# Altium PCB нижняя плата версия 4_13.03.PcbDoc
Units mm, origin at the board's own origin, x right, y up, seen from the top; angles counter-clockwise.
Board outline 57.07 x 52.6 mm, 4 copper layers (Top Layer, Layer 1, Layer 2, Bottom Layer), stack 0.603 mm thick; 110 components, 105 nets, 540 pads, 92 vias.
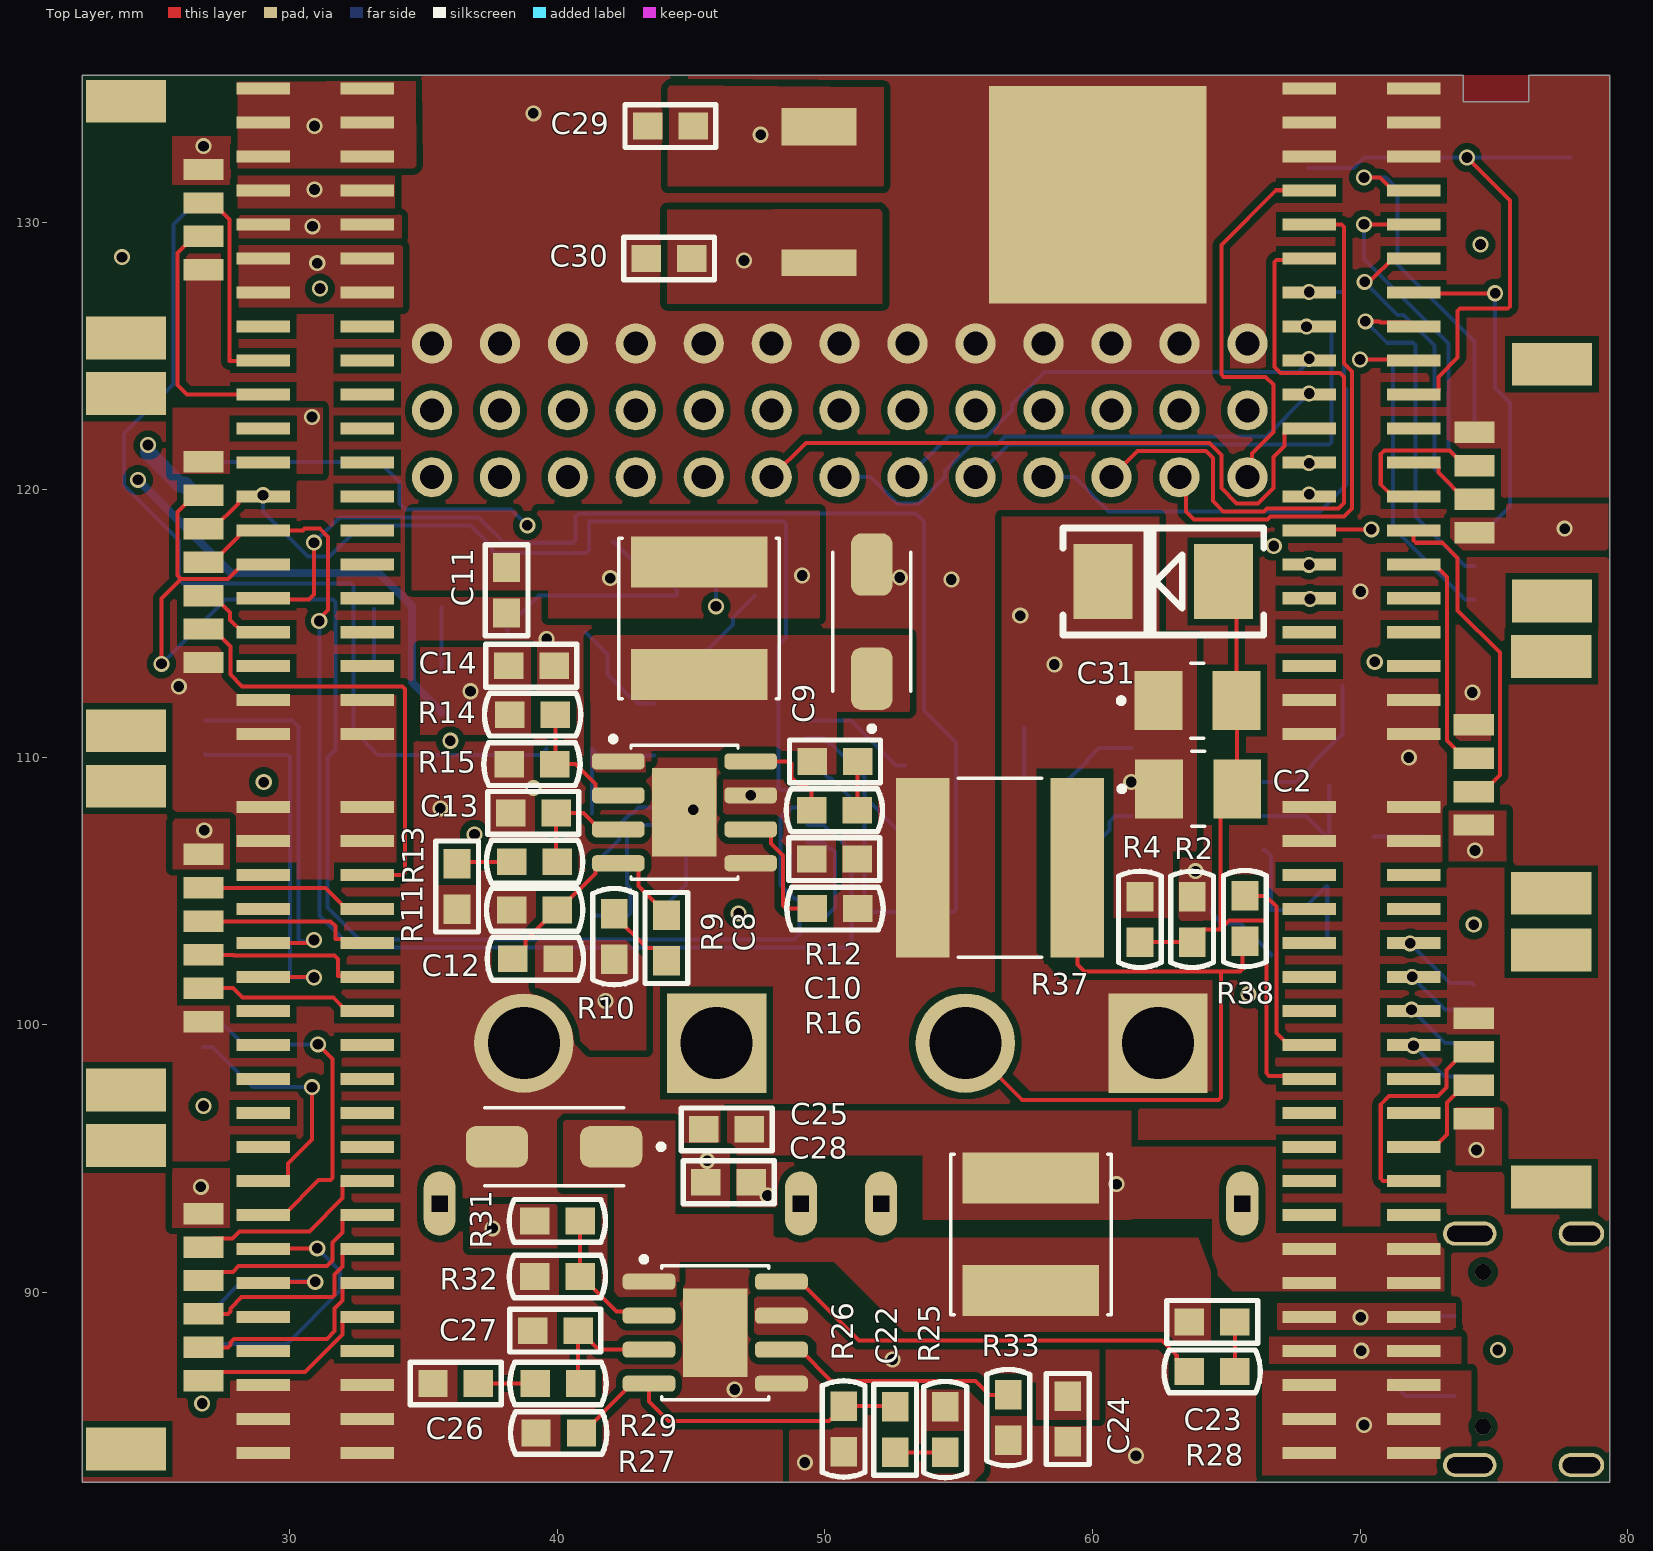
[diagram p0: Top Layer view]
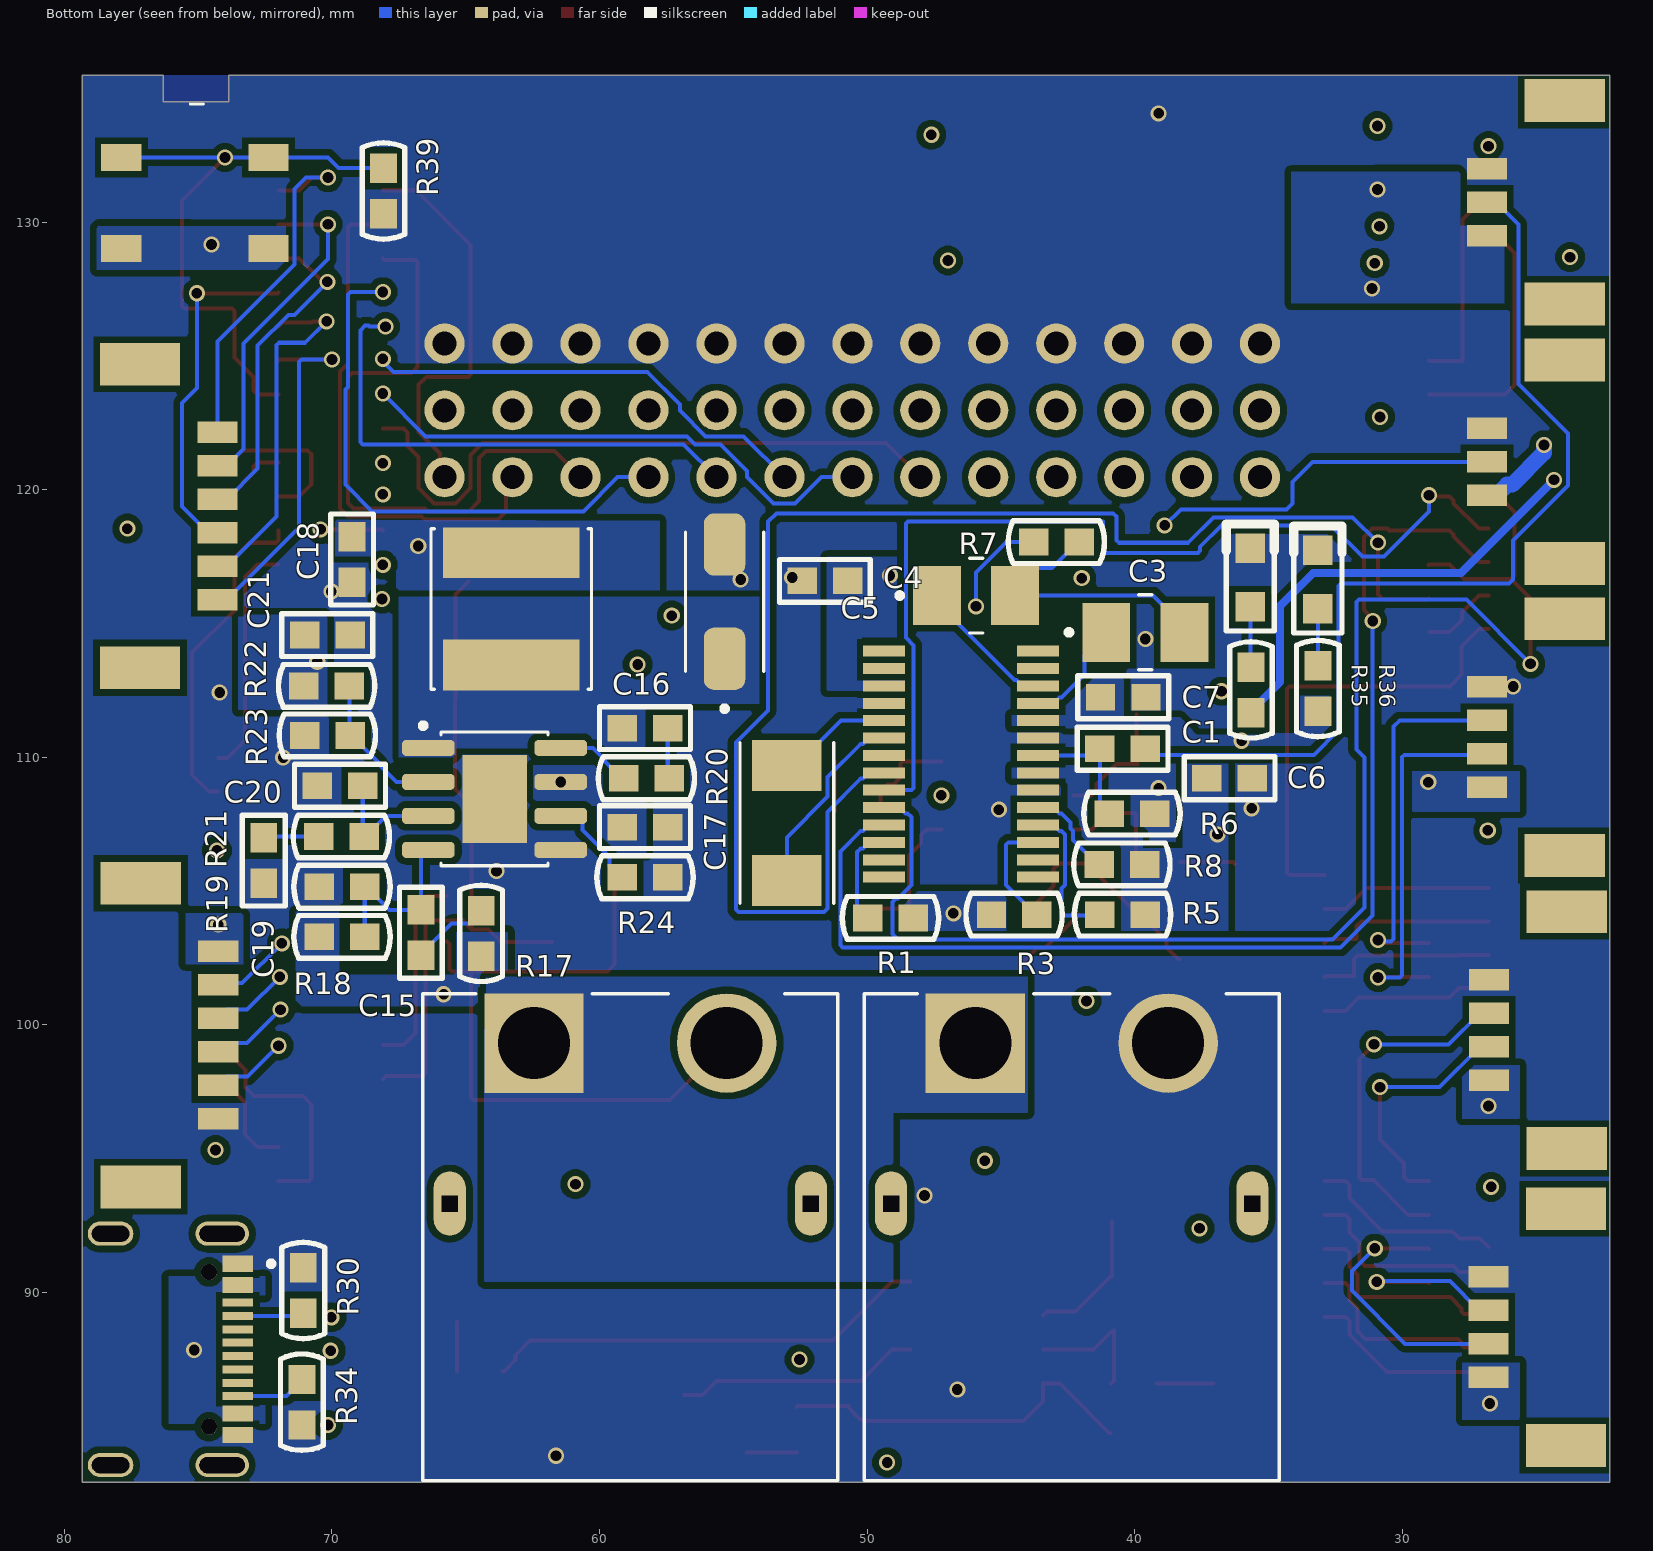
[diagram p1: Bottom Layer view, seen from below]
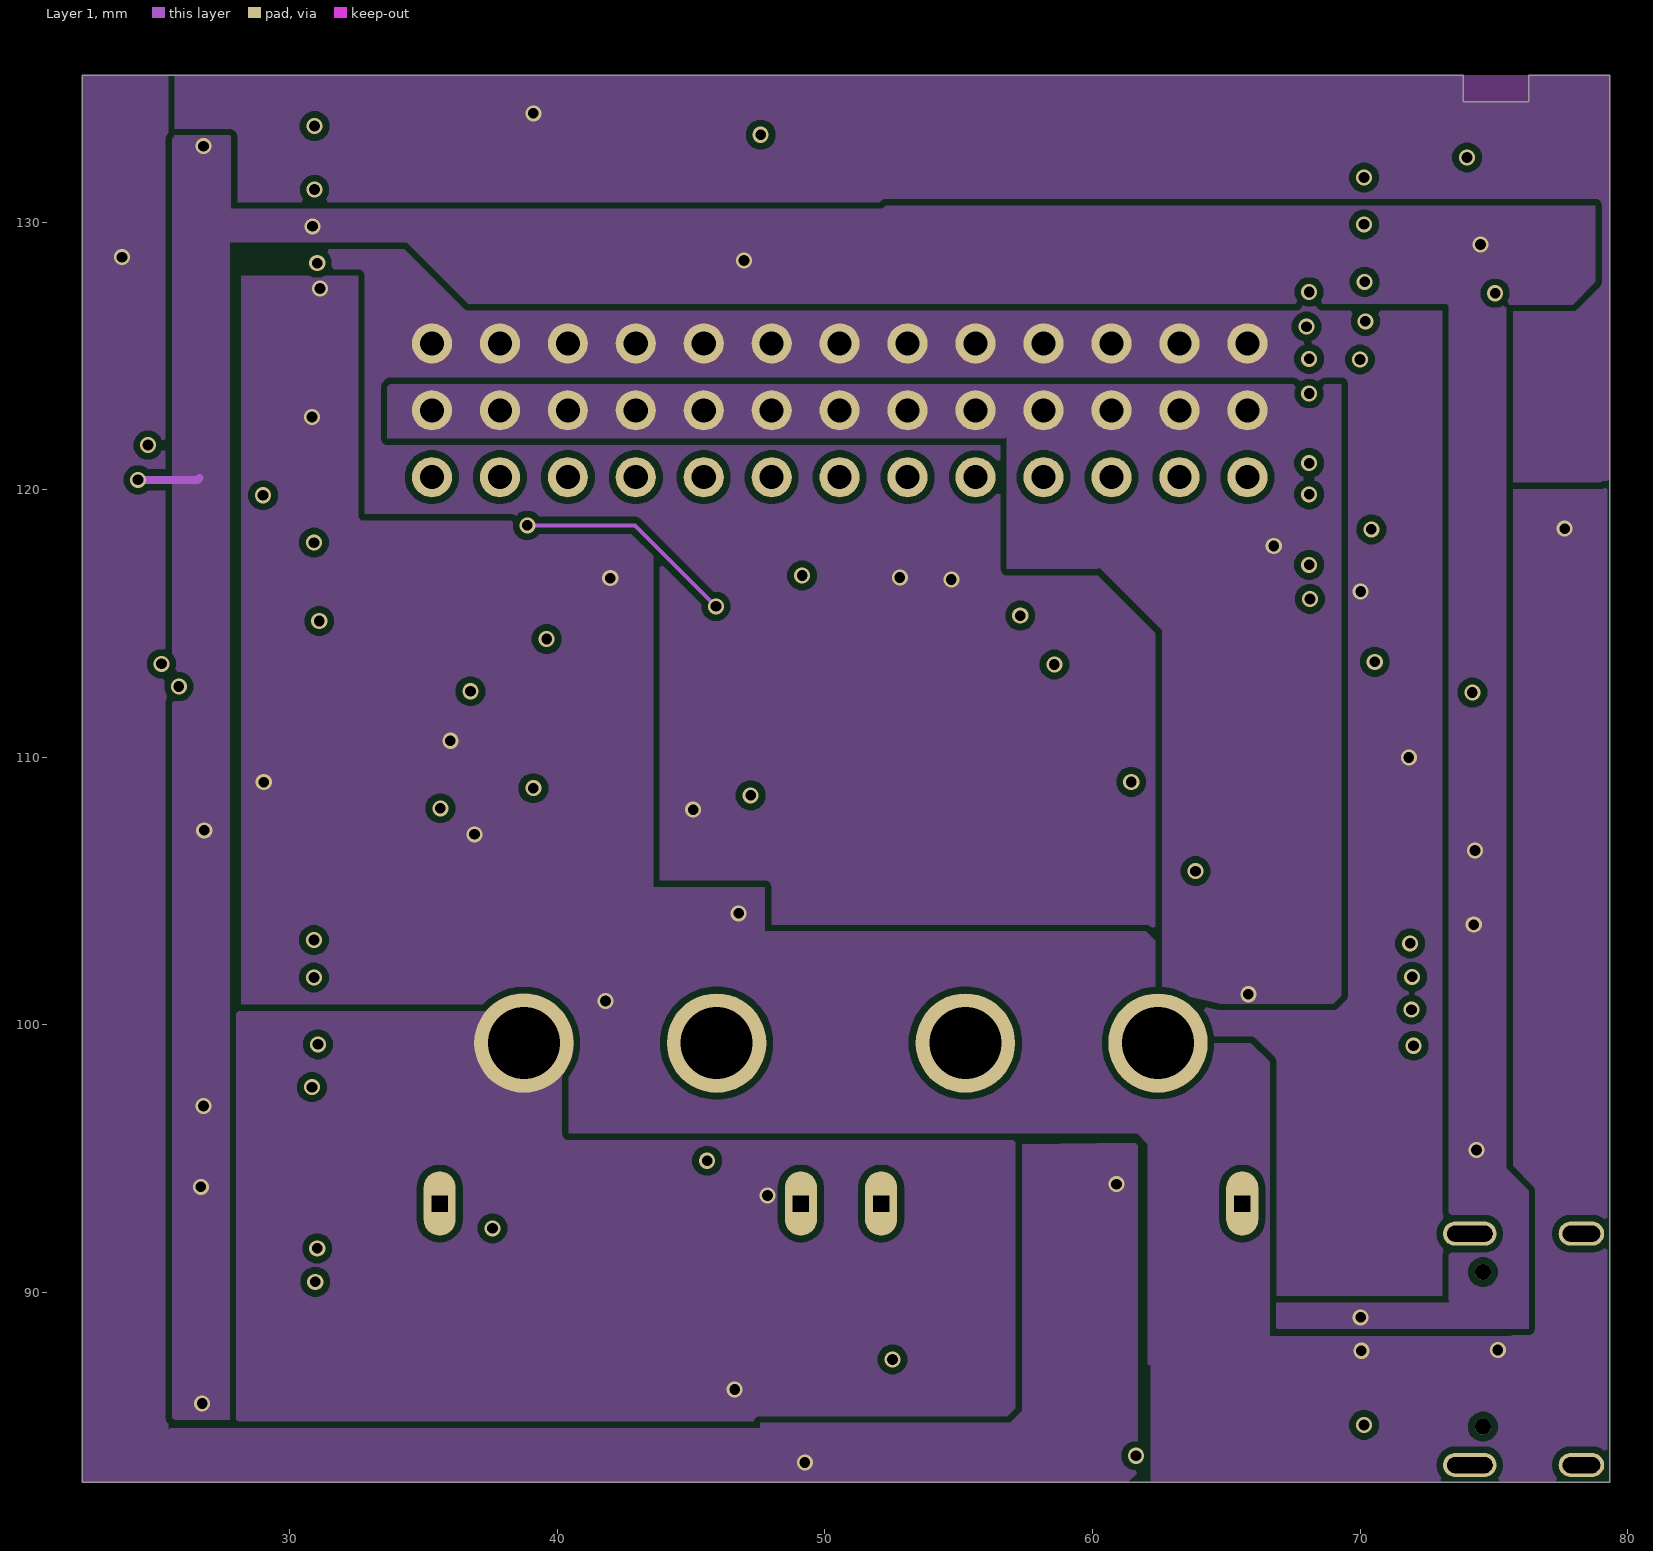
[diagram p2: Layer 1]
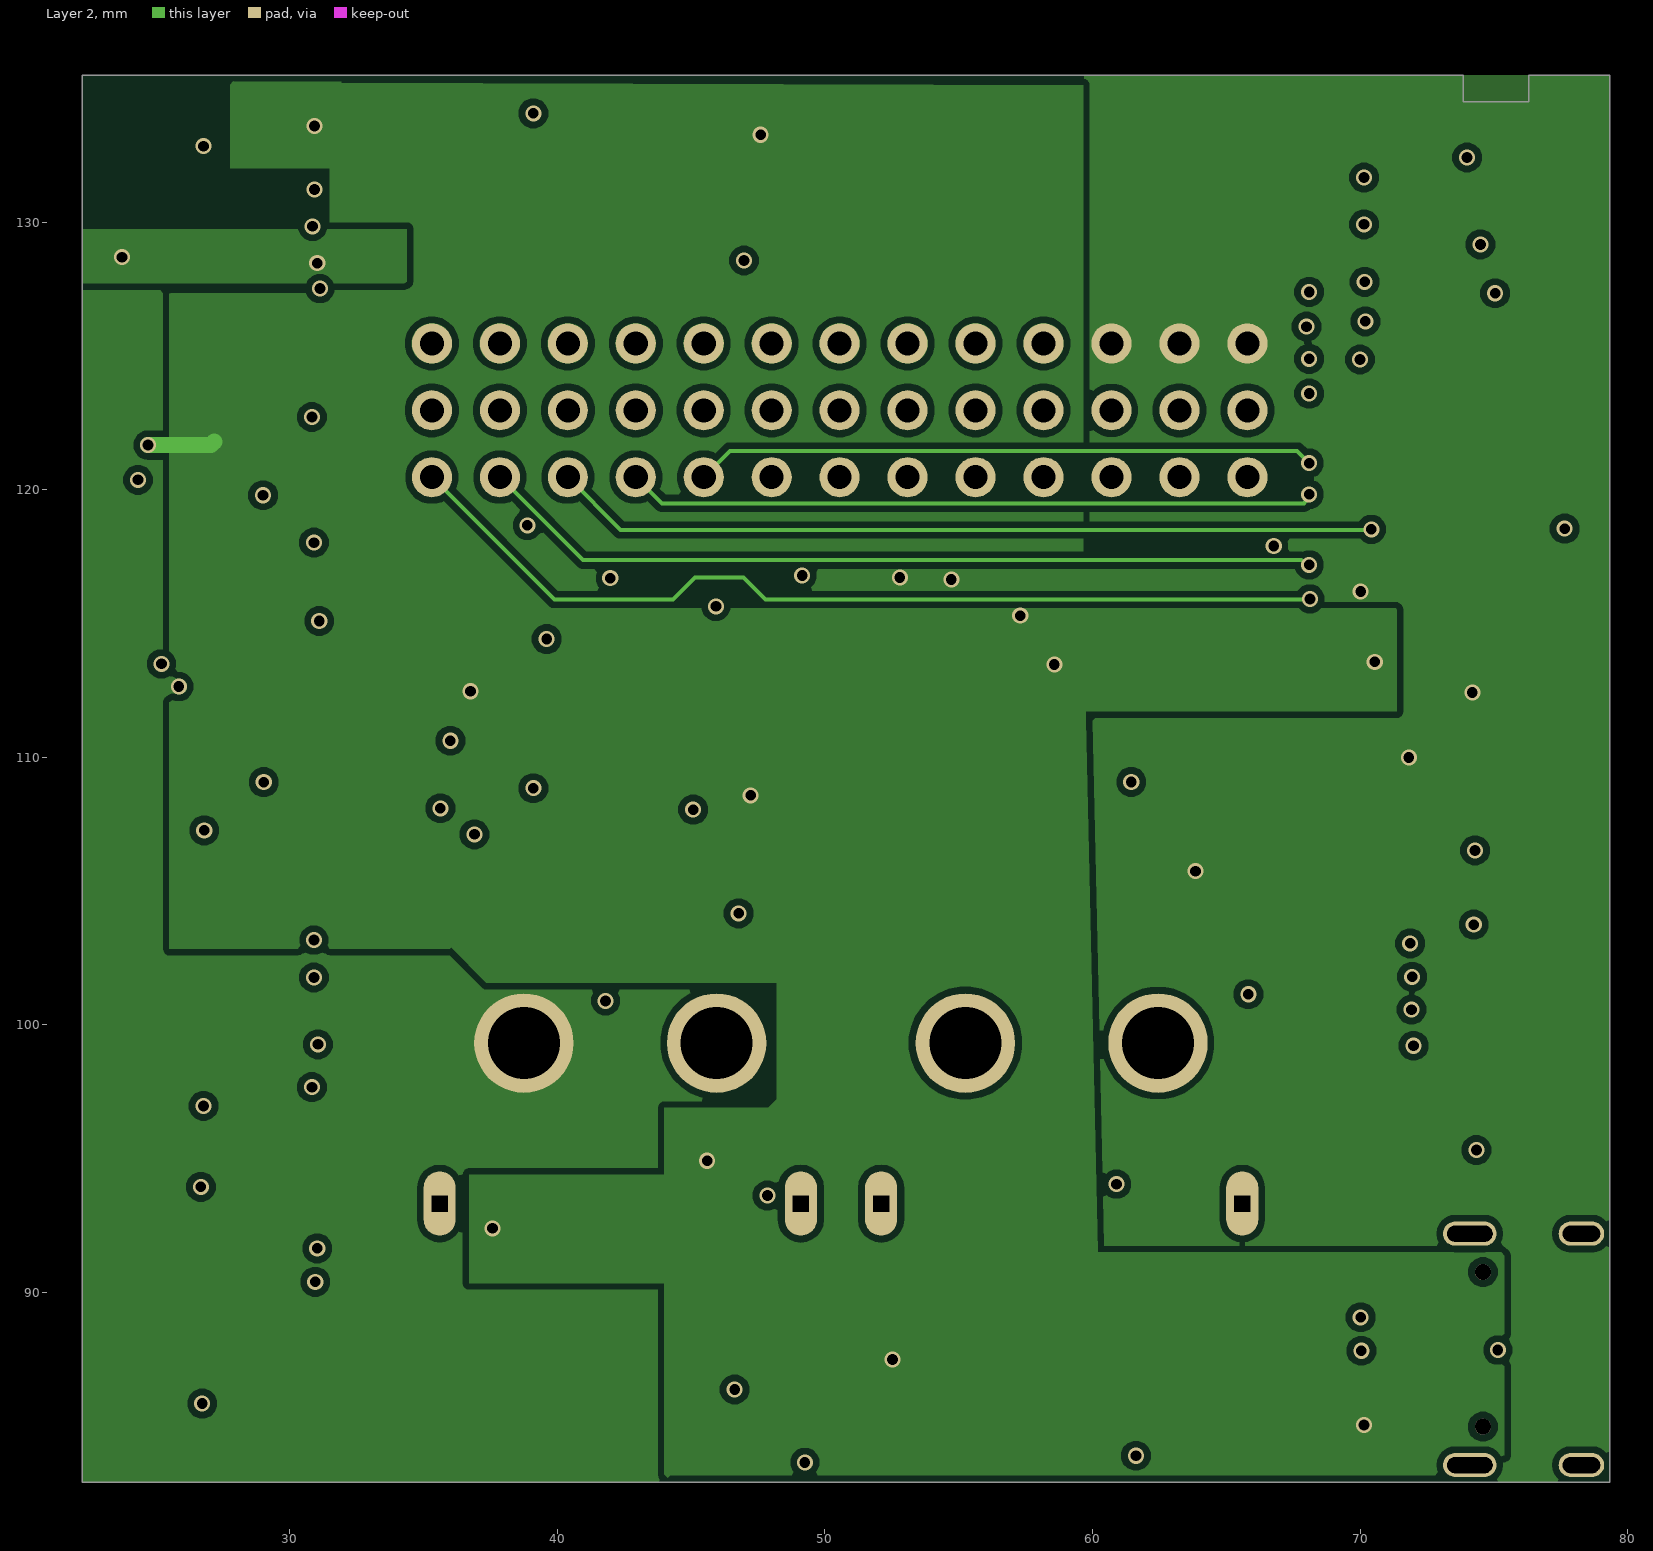
[diagram p3: Layer 2]
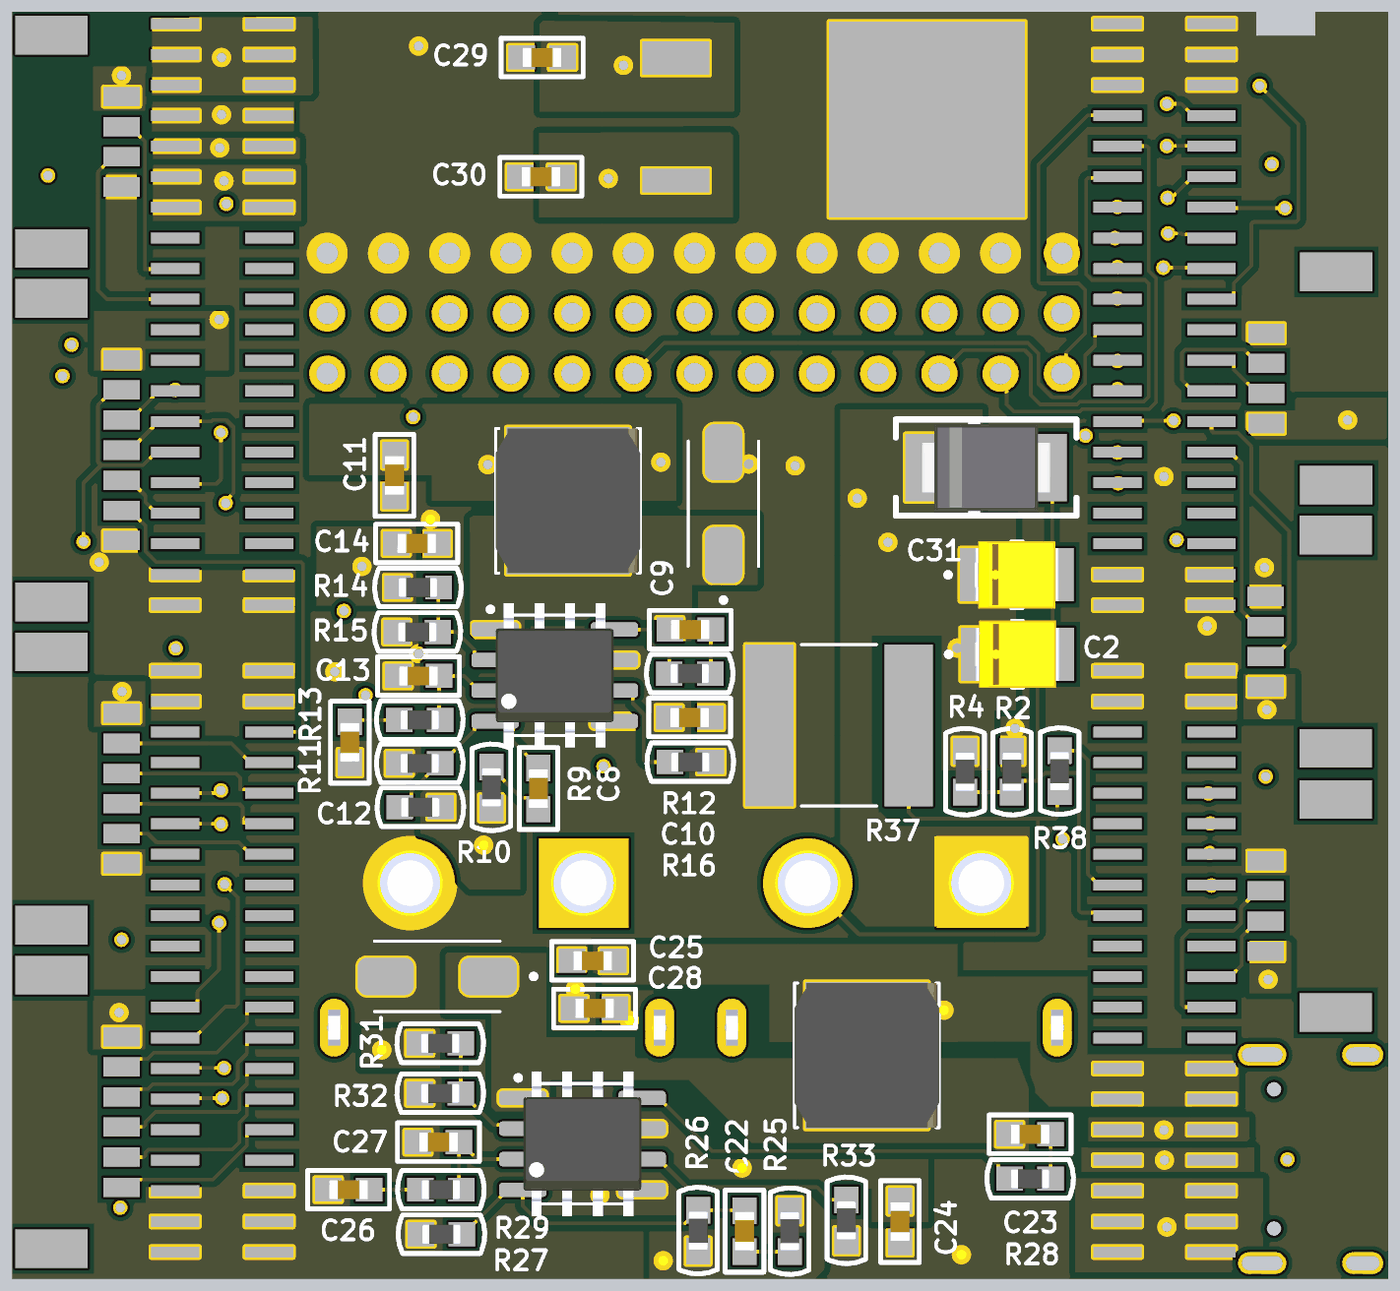
[diagram p4: 3D render of the assembled board from above, using the file's embedded part models]
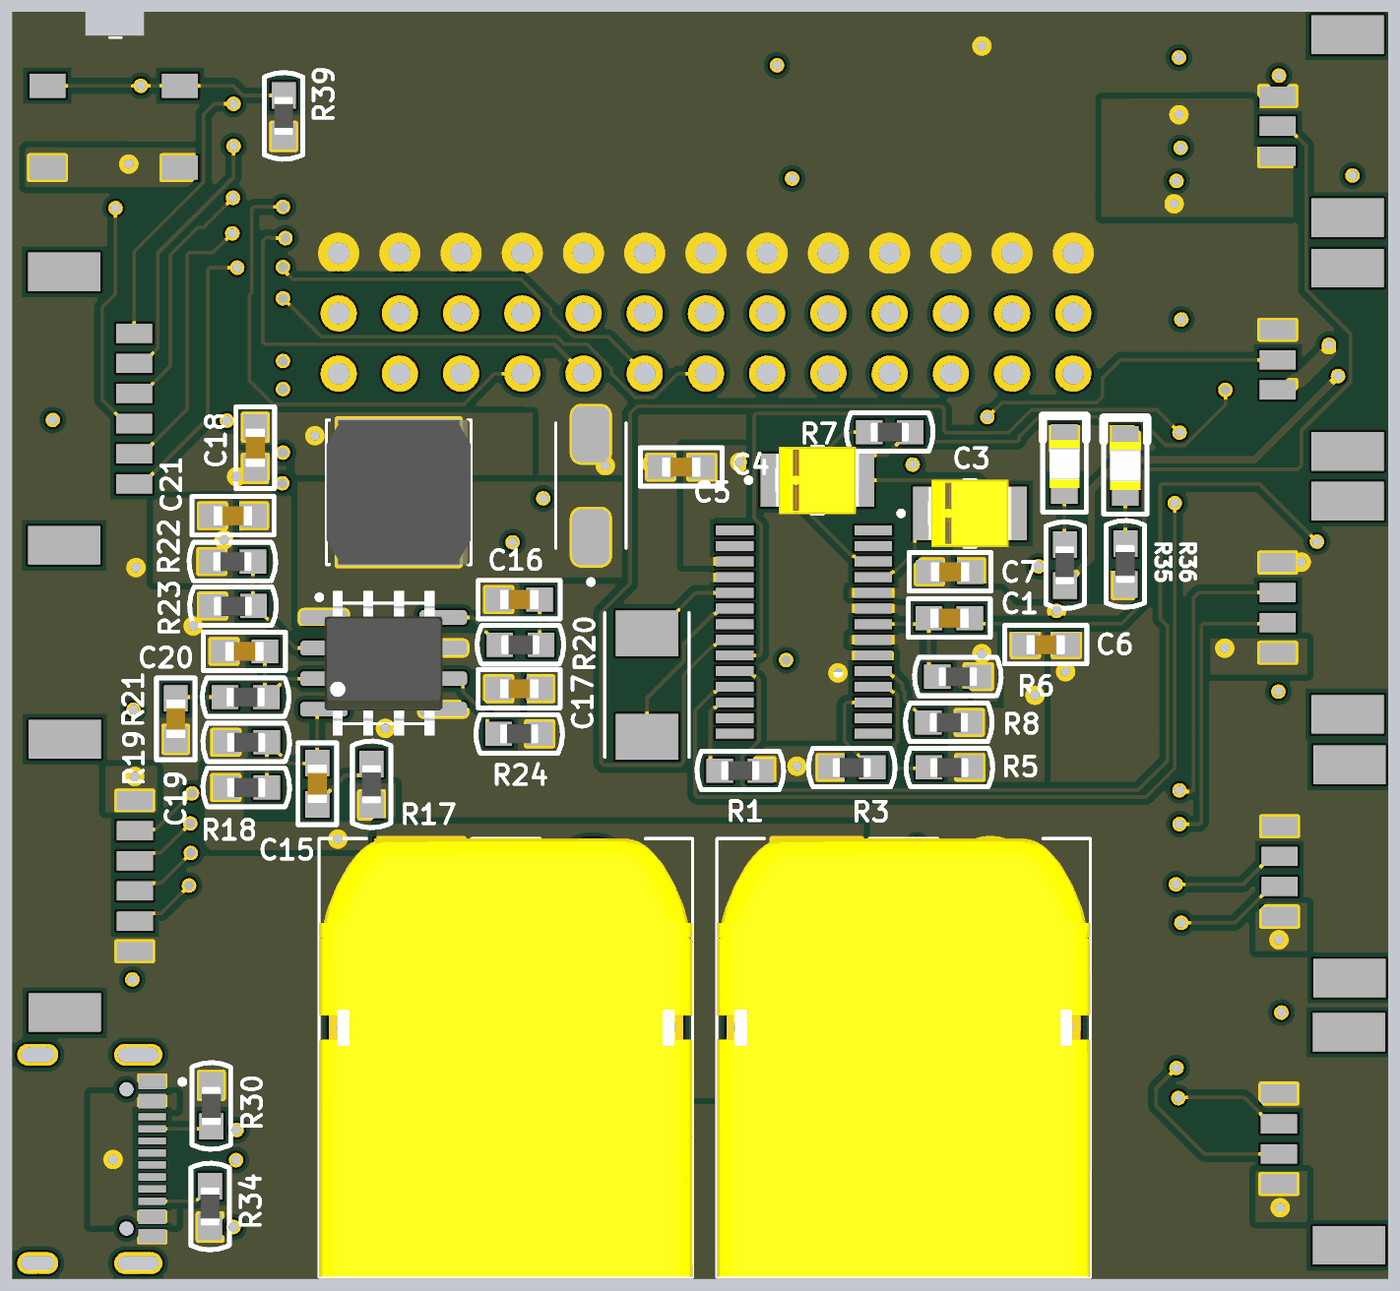
[diagram p5: 3D render of the assembled board from below, using the file's embedded part models]

## Layer stack, top to bottom
Top Solder: solder mask 0.0102, Solder Resist, Dk 3.5
Top Layer: signal copper 0.0356
Dielectric 2: prepreg 0.0711, PP-006, Dk 4.1
Layer 1: signal copper 0.035
Dielectric 1: dielectric 0.32, FR-4, Dk 4.8
Layer 2: signal copper 0.035
Dielectric 3: prepreg 0.0711, PP-006, Dk 4.1
Bottom Layer: signal copper 0.0356
Bottom Solder: solder mask 0.0102, Solder Resist, Dk 3.5

## Board outline
76.3,135.5 76.3,134.5 73.85,134.5 73.85,135.5 22.25,135.5 22.25,82.9 79.325,82.9 79.325,135.5

## Design rules (kind name [scope] priority, off if disabled: settings)
Clearance [All] p1: gap=0.15 ignorepadtopadclearanceinfootprint=FALSE except(0: Arc-Hole Track-Hole SMDPad-Hole THPad-Hole Via-Hole Fill-Hole Poly-Hole Region-Hole Text-Hole; 0.25: Arc-Fill Arc-Poly Track-Fill Track-Poly SMDPad-Fill SMDPad-Poly THPad-Fill THPad-Poly Via-Fill Via-Poly Fill-Fill Fill-Poly Poly-Poly)
PolygonConnect [All] p1: connectstyle=Direct reliefconductorwidth=0.254 reliefentries=4 polygonreliefangle="90 Angle" airgapwidth=0.254
RoutingVias [All] p1: holewidth=0.4 width=0.6 viastyle="Through Hole" minholewidth=0.4 minwidth=0.6 maxholewidth=0.4 maxwidth=0.6
SolderMaskExpansion [All] p1: expansion=0.102 istentingtop=FALSE
Width Width_6 [InNet('SERVO')] p1: maxlimit=0.6 minlimit=0.6 preferedwidth=0.6 minimp=50.000000 maximp=50.000000 favimp=50.000000
Width Width_5 [InNet('VCC')] p2: maxlimit=0.6 minlimit=0.6 preferedwidth=0.6 minimp=50.000000 maximp=50.000000 favimp=50.000000
Width Width_4 [InNet('GND')] p3: maxlimit=0.7 minlimit=0.6 preferedwidth=0.6 minimp=50.000000 maximp=50.000000 favimp=50.000000
Width Width_3 [InNet('5V')] p4: maxlimit=0.6 minlimit=0.5 preferedwidth=0.6 minimp=50.000000 maximp=50.000000 favimp=50.000000
Width Width_2 [InNet('4V2')] p5: maxlimit=0.4 minlimit=0.4 preferedwidth=0.4 minimp=50.000000 maximp=50.000000 favimp=50.000000
Width Width_1 [InNet('3V3')] p6: maxlimit=0.3 minlimit=0.3 preferedwidth=0.3 minimp=50.000000 maximp=50.000000 favimp=50.000000
Width [All] p7: maxlimit=0.6 minlimit=0.15 preferedwidth=0.15 minimp=50.000000 maximp=50.000000 favimp=50.000000
30 further rules are at their usual default settings.

## Classes and differential pairs
component class "нижняя плата версия 2": 3 C1 C2 C3 C4 C5 C6 C7 C8 C9 C10 C11 C12 C13 C14 C15 C16 C17 C18 C19 C20 C21 C22 C23 C24 C25 C26 C27 C28 C29 C30 C31 R1 R2 R3 R4 R5 R6 R7 R8 R9 R10 R11 R12 R13 R14 R15 R16 R17 R18 R19 R20 R21 R22 R23 R24 R25 R26 R27 R28 R29 R30 R31 R32 R33 R34 R35 R36 R37 R38 R39

## Components (designator, comment, footprint, x,y, rotation, side; value= is the part's Value field where it differs from the comment)
ADC "Header 1x6" "PicoBlade 6pin" 25.125,89.885 r270 top locked
AT "AT7456" at7456 46.564,109.201 r180 bottom
C1 "Capacitor" C0603 40.45,110.325 r180 bottom
C2 "T493B105K025BC6120" CAPPM3528X210N 63.95,108.825 r0 top
C3 "T493B105K025BC6120" CAPPM3528X210N 39.6,114.675 r180 bottom
C4 "Capacitor" C0603 51.575,116.6 r0 bottom
C5 "T493B105K025BC6120" CAPPM3528X210N 45.925,116.05 r180 bottom
C6 "Capacitor" C0603 36.45,109.225 r180 bottom
C7 "Capacitor" C0603 40.425,112.25 r180 bottom
C8 "22 pF" C0603 44.075,103.25 r90 top
C9 "0.1 uF" C0603 50.375,109.85 r180 top
C10 "0.1 uF" C0603 50.35,106.2 r180 top
C11 "22 uF" C0603 38.1,116.25 r270 top
C12 "330 pF" C0603 36.25,105.175 r270 top
C13 "1 pF" C0603 39.1,107.925 r180 top
C14 "4.7 uF" C0603 39.025,113.425 r180 top
C15 "22 pF" C0603 66.675,103.45 r90 bottom
C16 "0.1 uF" C0603 58.3,111.095 r0 bottom
C17 "0.1 uF" C0603 58.3,107.395 r0 bottom
C18 "22 uF" C0603 69.25,117.4 r270 bottom
C19 "330 pF" C0603 72.55,106.145 r270 bottom
C20 "1 pF" C0603 69.7,108.945 r0 bottom
C21 "4.7 uF" C0603 70.175,114.575 r0 bottom
C22 "22 pF" C0603 52.625,84.875 r90 top
C23 "0.1 uF" C0603 64.475,88.9 r180 top
C24 "0.1 uF" C0603 59.075,85.275 r90 top
C25 "33 uF" C0603 46.325,96.1 r180 top
C26 "330 pF" C0603 36.2,86.6 r180 top
C27 "2 pF" C0603 39.925,88.575 r180 top
C28 "4.7 uF" C0603 46.4,94.125 r180 top
C29 "0.1 uF" C0603 44.225,133.6 r0 top
C30 "10 uF" C0603 44.175,128.65 r0 top
C31 "T493B105K025BC6120" CAPPM3528X210N 63.925,112.125 r0 top
CAN1 "Header 1x4" "PicoBlade 4pin" 75.8,120.24 r90 top locked
D1 "B340A-13-F" DIOM5226X240N 51.75,115.075 r90 top
D2 "B340A-13-F" DIOM5226X240N 55.325,115.825 r90 bottom
D3 "B340A-13-F" DIOM5226X240N 39.875,95.45 r180 top
DC1 "MP1584EN" SOIC127P600X170-9N 44.75,107.95 r0 top
DC2 "MP1584EN" SOIC127P600X170-9N 63.925,108.45 r180 bottom
DC3 "MP1584EN" SOIC127P600X170-9N 45.9,88.5 r0 top
ENET "Header 1x6" "PicoBlade 6pin" 75.925,119.085 r270 bottom
GND "SERVO" SERV 50.423,125.475 r0 top locked
GPIO "Header 1x6" "PicoBlade 6pin" 25.125,103.31 r270 top locked
I2C "I2C 1x4" "PicoBlade 4pin" 25.3,110.725 r90 bottom locked
IN "IN 1x3" "PicoBlade 3pin" 24.175,130.79 r90 bottom locked
L1 "12.3 uH" IND_VLS6045EX-150M 45.3,115.2 r90 top
L2 "12.3 uH" IND_VLS6045EX-150M 63.3,115.55 r90 bottom
L3 "12.3 uH" IND_VLS6045EX-150M 57.7,92.175 r90 top
LDO "КФ1158Н" ТО-263 50.8,133.7 r270 top
LED1 "Text" LD0805 33.15,116.65 r90 bottom
LED2 "Text" LD0805 35.675,116.725 r90 bottom
OUT "OUT 1x3" "PicoBlade 3pin" 24.175,121.09 r90 bottom locked
R1 "1 kOm" R0603 49.125,104 r180 bottom
R2 "" R0603 63.725,103.95 r90 top
R3 "1 kOm" R0603 44.5,104.125 r0 bottom
R4 "" R0603 61.775,103.95 r90 top
R5 "1 kOm" R0603 40.45,104.125 r180 bottom
R6 "10 kOm" R0603 40.1,107.9 r0 bottom
R7 "10 kOm" R0603 42.925,118.05 r0 bottom
R8 "10 kOm" R0603 40.475,106 r180 bottom
R9 "0" R0603 42.125,103.3 r270 top
R10 "124 kOm" R0603 39.175,102.475 r0 top
R11 "23.7 kOm" R0603 39.15,104.3 r180 top
R12 "0" R0603 50.35,108.025 r180 top
R13 "76.8 kOm" R0603 39.15,106.1 r0 top
R14 "100 kOm" R0603 39.075,111.6 r180 top
R15 "18.7 kOm" R0603 39.05,109.75 r180 top
R16 "193.38 kOm" R0603 50.375,104.35 r0 top
R17 "0" R0603 64.425,103.425 r270 bottom
R18 "124 kOm" R0603 69.625,103.295 r0 bottom
R19 "23.7 kOm" R0603 69.625,105.17 r0 bottom
R20 "0" R0603 58.25,109.22 r0 bottom
R21 "76.8 kOm" R0603 69.65,107.045 r180 bottom
R22 "100 kOm" R0603 70.2,112.675 r0 bottom
R23 "18.7 kOm" R0603 70.175,110.825 r0 bottom
R24 "193.38 kOm" R0603 58.3,105.52 r180 bottom
R25 "0" R0603 54.5,84.875 r90 top
R26 "124 kOm" R0603 50.7,84.9 r270 top
R27 "29 kOm" R0603 40.05,84.75 r180 top
R28 "0" R0603 64.475,87.05 r180 top
R29 "100 kOm" R0603 40.025,86.6 r0 top
R30 "10 kOm" R0603 71.075,90.075 r90 bottom
R31 "100 kOm" R0603 40,92.675 r180 top
R32 "18.7 kOm" R0603 40,90.6 r180 top
R33 "193.38 kOm" R0603 56.85,85.325 r270 top
R34 "10 kOm" R0603 71.125,85.9 r270 bottom
R35 "10 kOm" R0603 35.65,112.525 r270 bottom
R36 "10 kOm" R0603 33.15,112.575 r270 bottom
R37 "" RESC6864X114N 56.55,105.875 r180 top
R38 "" R0603 65.7,103.975 r270 top
R39 "10 kOm" R0603 68.075,131.175 r90 bottom
S1 "SW-PB" TD-16EA 75.4,130.95 r180 bottom locked
SIGNAL "SERVO" SERV 50.423,120.475 r0 top locked
SPI "SPI 1x7" "PicoBlade 7pin" 26.75,117.335 r270 top locked
TYPE-C "TYPE-C-31-M-12" HRO_TYPE-C-31-M-12 78.275,87.875 r270 bottom locked
UART3 "UART 1x4" "PicoBlade 4pin" 25.225,99.775 r90 bottom locked
UART4 "UART 1x4" "PicoBlade 4pin" 75.775,109.315 r90 top locked
USART0 "UART 1x4" "PicoBlade 4pin" 25.25,88.675 r90 bottom locked
USART1 "UART 1x4" "PicoBlade 4pin" 25.25,130.135 r270 top locked
USART2 "UART 1x6" "PicoBlade 6pin" 75.9,99.685 r270 bottom locked
USART5 "UART 1x4" "PicoBlade 4pin" 75.775,98.34 r90 top locked
VCC "SERVO" SERV 50.423,122.975 r0 top locked
VD1 "Schottky" DO-214AA 62.65,116.575 r180 top
XP1 "PLLD-1.27-40S" "Headr 2x20 male" 30.947,123.149 r0 top locked
XP2 "PLLD-1.27-40S" "Headr 2x20 Male" 70.047,123.149 r0 top locked
XP3 "PLLD-1.27-40S" "Headr 2x20 male" 30.947,96.289 r0 top locked
XP4 "PLLD-1.27-40S" "Headr 2x20 Male" 70.047,96.289 r0 top locked
XT1 "XT60PW-M" AMASS_XT60PW-M 42.35,93.325 r0 bottom
XT2 "XT60PW-M" AMASS_XT60PW-M 58.85,93.325 r0 bottom
Y1 "ABM7-8.000MHZ-8-R80-D2Y-T" XTAL_ABM7-8.000MHZ-8-R80-D2Y-T 53,107.55 r90 bottom

## Footprints (in the part's own frame and the unit in brackets; to place one, negate y for a bottom-side part, rotate by r counter-clockwise, add the part's x,y. Pads: shape width x height; smd on the part's side, far side on the other; paste and mask are expansions set on the pad)
AMASS_XT60PW-M [mm]
  rect 3.716x3.716 / inner round 3.716 / far side rect 3.716x3.716 hole 2.7: 1(3.6,-6)
  round 3.716 hole 2.7: 2(-3.6,-6)
  oval 1.2x2.4 hole 0.6 square: S1(6.75,0) S2(-6.75,0)
  silkscreen extent -7.75,-7.85 7.75,10.35, body extent -7.75,-7.85 7.75,10.35, height 8.4
at7456 [mm]
  rect 1.57x0.41 smd: 1(-2.794,4.774) 2(-2.794,4.124) 3(-2.794,3.474) 4(-2.794,2.824) 5(-2.794,2.174) 6(-2.794,1.524) 7(-2.794,0.874) 8(-2.794,0.224) 9(-2.794,-0.426) 10(-2.794,-1.076) 11(-2.794,-1.726) 12(-2.794,-2.376) 13(-2.794,-3.026) 14(-2.794,-3.676) 15(2.956,-3.676) 16(2.956,-3.026) 17(2.956,-2.376) 18(2.956,-1.726) 19(2.956,-1.076) 20(2.956,-0.426) 21(2.956,0.224) 22(2.956,0.874) 23(2.956,1.524) 24(2.956,2.174) 25(2.956,2.824) 26(2.956,3.474) 27(2.956,4.124) 28(2.956,4.774)
C0603 [mm] "1608M"
  rect 1.1x1 smd: 1(-0.85,0) 2(0.85,0)
  silkscreen extent -1.7,-0.8 1.7,0.8, body extent -0.8,-0.4 0.8,0.4, height 0.91
CAPPM3528X210N [mm]
  rect 1.79x2.21 smd: 1(-1.46,0) 2(1.46,0)
  silkscreen extent -2.95,-1.4 0.25,1.4, body extent -1.75,-1.4 1.75,1.4, height 2.1
DIOM5226X240N [mm]
  rrect50% 2.33x1.55 smd: A(2.135,0) C(-2.135,0)
  silkscreen extent -4.1,-1.46 2.6,1.46
DO-214AA [mm] "(SMB) Low profile package"
  rect 2.2x2.8 smd: 1(-2.25,0) 2(2.25,0)
  silkscreen extent -3.75,-2 3.75,2, body extent -2.7,-1.8 2.7,1.8, height 2.3
"Headr 2x20 male" [mm]
  rect 2x0.45 smd: 1(-1.947,11.851) 2(1.953,11.851) 3(-1.947,10.581) 4(1.953,10.581) 5(-1.947,9.311) 6(1.953,9.311) 7(-1.947,8.041) 8(1.953,8.041) 9(-1.947,6.771) 10(1.953,6.771) 11(-1.947,5.501) 12(1.953,5.501) 13(-1.947,4.231) 14(1.953,4.231) 15(-1.947,2.961) 16(1.953,2.961) 17(-1.947,1.691) 18(1.953,1.691) 19(-1.947,0.421) 20(1.953,0.421) 21(-1.947,-0.849) 22(1.953,-0.849) 23(-1.947,-2.119) 24(1.953,-2.119) 25(-1.947,-3.389) 26(1.953,-3.389) 27(-1.947,-4.659) 28(1.953,-4.659) 29(-1.947,-5.929) 30(1.953,-5.929) 31(-1.947,-7.199) 32(1.953,-7.199) 33(-1.947,-8.469) 34(1.953,-8.469) 35(-1.947,-9.739) 36(1.953,-9.739) 37(-1.947,-11.009) 38(1.953,-11.009) 39(-1.947,-12.279) 40(1.953,-12.279)
"Headr 2x20 Male" [mm]
  rect 2x0.45 smd: 1(-1.947,11.851) 2(1.953,11.851) 3(-1.947,10.581) 4(1.953,10.581) 5(-1.947,9.311) 6(1.953,9.311) 7(-1.947,8.041) 8(1.953,8.041) 9(-1.947,6.771) 10(1.953,6.771) 11(-1.947,5.501) 12(1.953,5.501) 13(-1.947,4.231) 14(1.953,4.231) 15(-1.947,2.961) 16(1.953,2.961) 17(-1.947,1.691) 18(1.953,1.691) 19(-1.947,0.421) 20(1.953,0.421) 21(-1.947,-0.849) 22(1.953,-0.849) 23(-1.947,-2.119) 24(1.953,-2.119) 25(-1.947,-3.389) 26(1.953,-3.389) 27(-1.947,-4.659) 28(1.953,-4.659) 29(-1.947,-5.929) 30(1.953,-5.929) 31(-1.947,-7.199) 32(1.953,-7.199) 33(-1.947,-8.469) 34(1.953,-8.469) 35(-1.947,-9.739) 36(1.953,-9.739) 37(-1.947,-11.009) 38(1.953,-11.009) 39(-1.947,-12.279) 40(1.953,-12.279)
HRO_TYPE-C-31-M-12 [mm]
  rect 0.6x1.14 smd mask+0.05: A1_B12(-3.2,4.75) A4_B9(-2.4,4.75) B1_A12(3.2,4.75) B4_A9(2.4,4.75)
  rect 0.3x1.14 smd mask+0.05: A5(-1.25,4.75) A6(-0.25,4.75) A7(0.25,4.75) A8(1.25,4.75) B5(1.75,4.75) B6(0.75,4.75) B7(-0.75,4.75) B8(-1.75,4.75)
  oval 0.9x2 hole 0.6 slot 1.7 at 90 deg: S1(-4.325,4.17) S2(4.325,4.17)
  oval 0.9x1.7 hole 0.6 slot 1.4 at 90 deg: S3(-4.325,0) S4(4.325,0)
  round 0.6 hole 0.6 unplated: ""(-2.89,3.68) ""(2.89,3.68)
  silkscreen extent -3.3,5.9 -3.1,6.1
IND_VLS6045EX-150M [mm]
  rect 1.9x5.1 smd: 1(-2.1,0) 2(2.1,0)
  silkscreen extent -3,-3 3,3, body extent -3,-3 3,3, height 4.5
LD0805 [mm]
  rect 1.1x1.1 smd: 1(-1.1,0) 2(1.1,0)
  silkscreen extent -2,-0.9 2,0.9, body extent -1,-0.62 1,0.63, height 0.73
"PicoBlade 3pin" [mm]
  rect 0.8x1.5 smd: 1(-1.29,2.65) 2(-0.04,2.65) 3(1.21,2.65)
  rect 1.6x3 smd: S(-3.84,-0.25) S(3.76,-0.25)
"PicoBlade 4pin" [mm]
  rect 0.8x1.5 smd: 1(-1.84,1.525) 2(-0.59,1.525) 3(0.66,1.525) 4(1.91,1.525)
  rect 1.6x3 smd: S(-4.39,-1.375) S(4.46,-1.375)
"PicoBlade 6pin" [mm]
  rect 0.8x1.5 smd: 1(-3.065,1.65) 2(-1.815,1.65) 3(-0.565,1.65) 4(0.685,1.65) 5(1.935,1.65) 6(3.185,1.65)
  rect 1.6x3 smd: S(-5.615,-1.25) S(5.735,-1.25)
"PicoBlade 7pin" [mm]
  rect 0.8x1.5 smd: 1(-3.715,0.025) 2(-2.465,0.025) 3(-1.215,0.025) 4(0.035,0.025) 5(1.285,0.025) 6(2.535,0.025) 7(3.785,0.025)
  rect 1.6x3 smd: S(-6.265,-2.875) S(6.335,-2.875)
R0603 [mm] "1608M"
  rect 1.1x1 smd: 1(-0.85,0) 2(0.85,0)
  silkscreen extent -1.8,-0.8 1.8,0.8, body extent -0.8,-0.4 0.8,0.4, height 0.38
RESC6864X114N [mm]
  rect 2x6.71 smd: 1(-2.886,0) 2(2.886,0)
  silkscreen extent -1.56,-3.35 1.56,3.35
SERV [mm]
  round 1.5 hole 0.9: 1(-15.113,0) 2(-12.573,0) 3(-10.033,0) 4(-7.493,0) 5(-4.953,0) 6(-2.413,0) 7(0.127,0) 8(2.667,0) 9(5.207,0) 10(7.747,0) 11(10.287,0) 12(12.827,0) 13(15.367,0)
SOIC127P600X170-9N [mm]
  rrect54% 1.97x0.6 smd: 1(-2.475,1.905) 2(-2.475,0.635) 3(-2.475,-0.635) 4(-2.475,-1.905) 5(2.475,-1.905) 6(2.475,-0.635) 7(2.475,0.635) 8(2.475,1.905)
  rect 2.41x3.3 smd paste-3: 9(0,0)
  silkscreen extent -2.77,-2.5 2,2.84, body extent -2.45,-3 2.45,3, height 1.7
TD-16EA [mm]
  rect 1.5x1 smd: 1(-2.475,1.475) 1(3.025,1.475) 2(-2.475,-1.925) 2(3.025,-1.925)
  silkscreen extent 0.1,3.47 0.6,3.47
XTAL_ABM7-8.000MHZ-8-R80-D2Y-T [mm]
  rect 1.9x2.6 smd: 1(-2.15,0) 2(2.15,0)
  silkscreen extent -3,-1.75 3,1.75
ТО-263 [mm]
  rect 1.4x2.79 smd: 1(0.127,-1.022)
  rect 8.13x8.13 smd: 2(2.667,9.398)
  rect 0.99x2.79 smd: 3(5.207,-1.022)

## Part data
AT: "OSD"
C2 C3 C5 C31: "Tantalum Surface Mount Capacitors", Package="SMD-2 Kemet", Availability="In Stock", Check_prices=https://www.snapeda.com/parts/T493B105K025BC6120/KEMET/view-part/?ref=eda, MF=KEMET, MP=T493B105K025BC6120, Price=None, SnapEDA_Link=https://www.snapeda.com/parts/T493B105K025BC6120/KEMET/view-part/?ref=snap
C8 C9 C10 C11 C12 C13 C14 C15 C16 C17 C18 C19 C20 C21 C22 C23 C24 C25 C26 C27 C28 C29 C30: library part Capacitor, Published=18.05.2010, Publisher="Andrew Danich", Type=Конденсатор
D1 D2 D3: "Diode, Rectifier, 3a, 40v, Do-214ac, Full Reel", Package=None, Availability=Unavailable, MP=B340A-13-F, Price=None
L1 L2 L3: library part VLS6045EX-150M, "15 ÂµH Shielded Drum Core, Wirewound Inductor 2.5 A 75mOhm Nonstandard", Package="NON STANDARD-2 TDK", Availability="In Stock", Check_prices=https://www.snapeda.com/parts/VLS6045EX-150M/TDK/view-part/?ref=eda, MF=TDK, MP=VLS6045EX-150M, Price=None, Purchase-URL=https://pricing.snapeda.com/search/part/VLS6045EX-150M/?ref=eda, SnapEDA_Link=https://www.snapeda.com/parts/VLS6045EX-150M/TDK/view-part/?ref=snap
LED1 LED2: library part Led-1, Published=03.12.2013, Publisher="Andrew Danich", Type="Индикатор единичный"
R1 R2 R3 R4 R5 R6 R7 R8 R9 R10 R11 R12 R13 R14 R15 R16 R17 R18 R19 R20 R21 R22 R23 R24 R25 R26 R27 R28 R29 R30 R31 R32 R33 R34 R35 R36 R37 R38 R39: library part Resistor, Published=24.03.2010, Publisher="Andrew Danich", Type=Резистор
S1: "Switch", LatestRevisionDate=17-Jul-2002, LatestRevisionNote="Re-released for DXP Platform.", PackageDescription="Switch; 2 Leads", PackageReference=SPST-2, Published=24-Mar-1999, Publisher="Altium Limited"
Y1: "Crystal 22.1184MHz Ã‚Â±20ppm (Tol) Ã‚Â±30ppm (Stability) 18pF FUND 50Ohm 2-Pin Mini-CSMD T/R", Package=None, Availability=Unavailable, MP=ABM7-8.000MHZ-8-R80-D2Y-T, Price=None
C1 C4 C6 C7: Published=18.05.2010, Publisher="Andrew Danich", Type=Конденсатор
VD1: Published=18.05.2010, Publisher="Andrew Danich", Type=Диод

## Via types
v1: diameter 0.6, hole 0.4, Top Layer to Bottom Layer, 92 vias

## Nets (pads, with @x,y where several pads share a name; then routed paths per layer and width w, separated by ;. In a path a pad name is that pad's centre, name@x,y a point inside that pad or via, vN(x,y) a via of type N, cw(c..) or ccw(c..) an arc to the next point about the centre after c; other vN are vias at no path point)
3V3: ADC.1 C30.2 GPIO.1 LDO.3 R35.2 S1.2 UART3.1 UART4.1 USART0.1 USART1.1 USART2.1 USART5.1 XP1.9 XP1.10 XP4.31 XP4.32 | length 19
  Layer 1 w0.3: v1(24.325,120.375) 26.55,120.375 26.625,120.45
  Bottom Layer w0.3: v1(24.325,120.375) 27.8,116.9 33.324,116.9 34.562,115.662 34.562,112.813 35.65,111.725 R35.2
  other v1: 26.725,85.85 70.025,89.075 26.675,93.95 74.35,95.325 26.775,96.975 74.25,103.75 74.3,106.525 26.8,107.275 46.975,128.575 74.5,129.175 30.85,129.85 26.775,132.85
4V2: C25.1 L3.2 R25.2 R26.2 XP1.11 XP1.12 XP1.13 XP1.14 XP4.27 XP4.28 XP4.29 XP4.30
  other v1: 49.25,83.65 60.9,94.05 31.025,128.475 23.725,128.7
5V: AT.3 AT.21 AT.24 C4.1 C6.1 C7.1 C11.1 CAN1.1 I2C.1 IN.1 L1.2 R1.2 R3.2 R5.2 R8.2 R9.2 R10.2 R36.2 SPI.1 TYPE-C.A4_B9 TYPE-C.B4_A9 XP1.7 XP1.8 XP4.33 XP4.34
  other v1: 70.05,87.825 75.15,87.85 41.8,100.9 46.775,104.175 36.9,107.125 29.025,109.075 36,110.625 41.975,116.7 49.15,116.8 77.65,118.55 30.825,122.725 31.125,127.525 30.925,131.225
GND: AT.4 AT.20 AT.23 C4.2 C6.2 C7.2 C10.1 C11.2 C12.2 C13.2 C14.1 C17.1 C18.2 C19.2 C20.2 C21.1 C24.1 C25.2 C26.2 C27.2 C28.1 C29.1 C30.1 CAN1.4 D1.A D2.A D3.A DC1.5 DC1.9 DC2.5 DC2.9 DC3.5 DC3.9 GND.1 GND.2 GND.3 GND.4 GND.5 GND.6 GND.7 GND.8 GND.9 GND.10 GND.11 GND.12 GND.13 GPIO.6 I2C.4 IN.3 LDO.2 LED1.2 LED2.2 OUT.3 R2.2 R6.1 R11.2 R15.2 R16.2 R19.2 R23.2 R24.2 R27.2 R30.2 R32.2 R33.2 R34.2 R37.2 R39.1 SPI.7 TYPE-C.A1_B12 TYPE-C.B1_A12 UART3.4 UART4.4 USART0.4 USART1.4 USART2.6 USART5.4 XP1.37 XP1.38 XP1.39 XP1.40 XP2.1 XP2.2 XP2.3 XP2.4 XP2.5 XP2.6 XP2.37 XP2.38 XP2.39 XP2.40 XP3.1 XP3.2 XP3.3 XP3.4 XP3.35 XP3.36 XP3.37 XP3.38 XP3.39 XP3.40 XP4.1 XP4.2 XP4.3 XP4.4 XT1.2
  other v1: 61.625,83.9 46.625,86.375 47.85,93.625 63.85,105.75 45.075,108.05 35.625,108.1 39.1,108.85 71.825,110 74.2,112.425 25.85,112.65 39.6,114.425 70.025,116.2 54.725,116.65 52.8,116.725 39.1,134.075
NetADC_2: ADC.2 XP3.24 | length 7.4
  Top Layer w0.15: ADC.2 27.1,92.025 27.852,92.025 28.114,92.288 30.738,92.288 31.975,93.525 31.975,94.02 32.125,94.17 XP3.24
NetADC_3: ADC.3 XP3.26 | length 7.8
  Top Layer w0.15: ADC.3 27.1,90.775 27.872,90.775 28.084,90.988 31.388,90.988 31.6,91.2 31.6,91.873 31.975,92.248 31.975,92.75 32.125,92.9 XP3.26
NetADC_4: ADC.4 XP3.28 | length 7.9
  Top Layer w0.15: ADC.4 27.687,89.2 27.775,89.288 27.775,89.408 28.192,89.825 31.587,89.825 31.675,89.913 31.675,90.678 31.975,90.978 31.975,91.48 32.125,91.63 XP3.28
NetADC_5: ADC.5 XP3.30 | length 8
  Top Layer w0.15: ADC.5 27.687,87.95 27.775,88.038 27.775,88.138 27.907,88.27 31.383,88.27 31.675,88.562 31.675,89.408 31.975,89.708 31.975,90.21 32.125,90.36 XP3.30
NetADC_6: ADC.6 XP3.32 | length 7.4
  Top Layer w0.15: ADC.6 27.1,87.025 30.562,87.025 31.975,88.438 31.975,88.94 32.125,89.09 XP3.32
NetAT_5: AT.5 Y1.2 | length 4.3
  Bottom Layer w0.15: AT.5 50.975,111.375 52.65,109.7 Y1.2
NetAT_6: AT.6 Y1.1 | length 7.2
  Bottom Layer w0.15: AT.6 49.938,110.725 50.158,110.505 50.236,110.505 51.475,109.266 51.475,108.533 53,107.008 Y1.1
NetAT_8: AT.8 XP1.31 | length 53.5
  Top Layer w0.15: XP1.31 29.05,115.9 30.712,115.9 30.901,116.088 v1(30.901,118.028)
  Bottom Layer w0.15: v1(30.901,118.028) 31.848,118.975 37.05,118.975 38,118.025 40.587,118.025 40.675,118.113 40.675,119 40.8,119.125 53.387,119.125 53.7,118.812 53.7,111.756 54.9,110.556 54.9,104.313 54.812,104.225 51.607,104.225 51.475,104.357 51.475,107.966 50.236,109.205 50.158,109.205 49.938,109.425 AT.8
NetAT_9: AT.9 SPI.3 XP1.25 | length 36.9
  Top Layer w0.15: SPI.3 27.125,118.55 28.075,119.5 28.075,119.61 28.225,119.76 XP1.25
  Bottom Layer w0.15: v1(29,119.8) 29,119.186 30.683,117.503 31.485,117.503 32.657,118.675 36.75,118.675 37.55,117.875 37.55,117.738 37.638,117.65 41.075,117.65 41.175,117.75 41.175,118.825 48.462,118.825 48.55,118.737 48.55,114.475 48.26,114.185 48.26,108.863 48.348,108.775 AT.9
NetAT_10: AT.10 SPI.2 XP1.29 | length 53.7
  Top Layer w0.15: v1(25.2,113.5) 25.2,115.943 25.932,116.675 ; SPI.2 26.425,119.8 25.8,119.175 25.8,116.807 25.932,116.675 ; XP1.29@29.02,117.2 XP1.29 28.225,117.22 27.68,116.675 25.932,116.675
  Bottom Layer w0.15: v1(25.2,113.5) 27.6,115.9 31.612,115.9 31.7,115.812 31.7,110.3 31.4,110 31.4,104.4 32.6,103.2 48.843,103.2 49.05,103.407 49.05,104.593 48.918,104.725 48.85,104.725 48.348,105.227 48.348,107.773 48.48,107.905 48.558,107.905 48.778,108.125 AT.10
NetAT_11: AT.11 SPI.4 XP1.27 | length 45.6
  Top Layer w0.15: SPI.4 27.125,117.3 28.075,118.25 28.075,118.34 28.225,118.49 XP1.27 30.49,118.49 30.553,118.553 31.118,118.553 31.426,118.246 31.426,115.517 31.1,115.191 v1(31.1,115.1)
  Bottom Layer w0.15: v1(31.1,115.1) 31.1,104.1 32.3,102.9 50.912,102.9 51,102.988 51,106.491 50.236,107.255 50.158,107.255 49.938,107.475 AT.11
NetAT_12: AT.12 R1.1 | length 3.8
  Bottom Layer w0.15: AT.12 49.938,106.825 50.158,106.605 50.236,106.605 50.368,106.473 50.368,104.393 R1.1
NetAT_17: AT.17 R3.1 | length 4.3
  Bottom Layer w0.15: AT.17 44.712,106.825 44.8,106.737 44.8,105.225 43.7,104.125 R3.1
NetAT_18: AT.18 R5.1 | length 5.6
  Bottom Layer w0.15: R5.1 41.325,104.1 42.642,104.1 42.73,104.188 42.73,105.095 42.598,105.227 42.598,107.123 42.73,107.255 42.808,107.255 43.028,107.475 AT.18
NetAT_19: AT.19 R8.1 | length 3.5
  Bottom Layer w0.15: R8.1 41.375,106 42.298,106.923 42.298,107.247 42.4,107.349 42.4,107.575 42.73,107.905 42.808,107.905 43.028,108.125 AT.19
NetAT_22: AT.22 C1.1 R6.2 | length 4.8
  Bottom Layer w0.15: R6.2@41.3,107.9 C1.1 41.55,110.075 AT.22
NetAT_25: AT.25 C3.1 | length 4.1
  Bottom Layer w0.15: C3.1 41.88,113.855 41.88,113.095 42.73,112.245 42.808,112.245 43.028,112.025 AT.25
NetAT_26: AT.26 C5.1 | length 5.3
  Bottom Layer w0.15: AT.26 44.188,112.675 44.408,112.895 44.486,112.895 46.565,114.974 46.565,115.23 C5.1
NetC1_2: C1.2 IN.2 | length 36.1
  Bottom Layer w0.15: IN.2 26.475,130.75 25.65,129.925 25.65,123.957 23.8,122.107 23.8,120.158 25.85,118.108 25.85,116.65 26,116.5 32.287,116.5 32.375,116.412 32.375,111.025 33.3,110.1 39.375,110.1 C1.2
NetC2_2: C2.2 C31.2 R2.1 R4.1 VD1.1 XP4.17 | length 25.9
  Top Layer w0.15: R4.1 R2.1 63.725,103.15 64.15,103.575 64.782,103.575 ; VD1.1 65.385,116.09 C31.2 65.41,112.1 C2.2 64.782,108.197 64.782,103.575 ; XP4.17 67.98,98.1 66.6,98.1 66.5,98.2 66.5,103.812 66.412,103.9 65.107,103.9 64.782,103.575
NetC3_2: C3.2 C5.2 R7.1 | length 10.4
  Bottom Layer w0.15: C3.2 38.14,114.885 39.305,116.05 C5.2 44.465,116.26 43.645,117.08 43.095,117.08 42.125,118.05 R7.1
NetC8_1: C8.1 R9.1 | length 2.7
  Top Layer w0.15: R9.1 42.125,104.1 43.35,102.875 43.65,102.875 44.075,102.45 C8.1
NetC8_2: C8.2 DC1.4 R10.1 R11.1 | length 8.7
  Top Layer w0.15: R10.1 38.375,102.475 38.8,102.9 38.8,103.15 39.95,104.3 R11.1 40.05,104.3 41.419,105.669 41.419,105.827 41.637,106.045 DC1.4 42.805,106.045 43.023,105.827 43.023,105.202 44.075,104.15 C8.2
NetC9_1: C9.1 R12.1 | length 1.8
  Top Layer w0.15: R12.1 51.225,108.05 C9.1
NetC9_2: C9.2 D1.C DC1.1 L1.1
NetC12_1: C12.1 R13.1 | length 2.1
  Top Layer w0.15: C12.1 36.325,106.1 R13.1
NetC13_1: C13.1 DC1.3 R13.2 | length 4.4
  Top Layer w0.15: R13.2 39.95,106.15 C13.1 40.98,107.925 41.59,107.315 DC1.3
NetC15_1: C15.1 R17.1 | length 3
  Bottom Layer w0.15: R17.1 64.425,104.225 64.85,103.8 65.525,103.8 66.675,102.65 C15.1
NetC15_2: C15.2 DC2.4 R18.1 R19.1 | length 6.7
  Bottom Layer w0.15: DC2.4 66.457,106.545 66.675,106.327 C15.2 67.855,104.3 68.725,105.17 R19.1 R18.1
NetC16_1: C16.1 R20.1 | length 1.9
  Bottom Layer w0.15: R20.1 57.45,109.27 C16.1
NetC16_2: C16.2 D2.C DC2.1 L2.1
NetC19_1: C19.1 R21.1 | length 2.1
  Bottom Layer w0.15: R21.1 72.5,107.045 C19.1
NetC20_1: C20.1 DC2.3 R21.2 | length 4.6
  Bottom Layer w0.15: DC2.3 67.98,107.815 68.75,107.045 R21.2 68.85,107.095 C20.1
NetC22_1: C22.1 R25.1 | length 1.9
  Top Layer w0.15: C22.1 R25.1
NetC22_2: C22.2 DC3.4 R26.1 R27.1 | length 13.7
  Top Layer w0.15: R27.1 40.95,84.75 42.569,86.369 42.569,86.377 42.787,86.595 DC3.4 43.425,85.925 44.15,85.2 50.15,85.2 50.225,85.275 50.275,85.275 50.7,85.7 R26.1 52.6,85.75 C22.2
NetC23_1: C23.1 R28.1 | length 1.9
  Top Layer w0.15: R28.1 C23.1
NetC23_2: C23.2 D3.C DC3.1 L3.1
NetC26_1: C26.1 R29.1 | length 2.1
  Top Layer w0.15: C26.1 R29.1
NetC27_1: C27.1 DC3.3 R29.2 | length 5
  Top Layer w0.15: R29.2 40.775,86.7 C27.1 40.825,88.575 41.535,87.865 DC3.3
NetCAN1_2: CAN1.2 XP2.24 | length 3
  Top Layer w0.15: XP2.24 72.775,121.03 72.925,120.88 72.925,120.65 73.925,119.65 CAN1.2
NetCAN1_3: CAN1.3 XP2.26 | length 6.3
  Top Layer w0.15: XP2.26 71.225,119.76 70.775,120.21 70.775,121.348 70.907,121.48 73.345,121.48 73.925,120.9 CAN1.3
NetDC1_2: DC1.2 R14.1 R15.1 | length 4.8
  Top Layer w0.15: R14.1 39.925,109.775 R15.1 40.675,109.75 41.419,109.006 41.419,108.803 41.637,108.585 DC1.2
NetDC1_6: DC1.6 R16.1 | length 4.8
  Top Layer w0.15: DC1.6 47.77,107.315 47.988,107.097 47.988,106.79 48.435,106.343 48.435,104.46 48.545,104.35 R16.1
NetDC1_8: DC1.8 R12.2 | length 3.7
  Top Layer w0.15: DC1.8 48.662,109.855 48.75,109.767 48.75,109.257 49.016,108.991 49.234,108.991 49.5,108.725 R12.2
NetDC2_2: DC2.2 R22.1 R23.1 | length 5.5
  Bottom Layer w0.15: DC2.2 67.585,109.085 68.217,109.717 68.217,109.767 69.275,110.825 R23.1 69.35,110.85 R22.1
NetDC2_6: DC2.6 R24.1 | length 3.6
  Bottom Layer w0.15: R24.1 59.2,105.52 59.625,105.945 59.625,106.286 60.629,107.29 60.629,107.597 60.847,107.815 DC2.6
NetDC2_8: DC2.8 R20.2 | length 2.8
  Bottom Layer w0.15: R20.2 59.15,109.22 59.787,109.857 59.787,109.902 60.24,110.355 DC2.8
NetDC3_2: DC3.2 R31.1 R32.1 | length 5.3
  Top Layer w0.15: R31.1 R32.1 40.9,90.6 42.215,89.285 43.275,89.285 DC3.2
NetDC3_6: DC3.6 R33.1 | length 9.2
  Top Layer w0.15: DC3.6 49.06,87.865 50.225,86.7 55.625,86.7 56.15,86.175 R33.1
NetDC3_8: DC3.8 R28.2 | length 16.7
  Top Layer w0.15: DC3.8 49.06,90.405 51.265,88.2 62.594,88.2 63.15,87.643 63.15,87.475 63.575,87.05 R28.2
NetENET_1: ENET.1 XP2.8 | length 13.8
  Top Layer w0.15: v1(70.15,131.675) 70.74,131.675 71.225,131.19 XP2.8
  Bottom Layer w0.15: v1(70.15,131.675) 70.975,131.675 71.4,131.25 71.4,128.425 74.275,125.55 ENET.1
NetENET_2: ENET.2 XP2.10 | length 12.8
  Top Layer w0.15: v1(70.15,129.925) 71.995,129.925 XP2.10
  Bottom Layer w0.15: v1(70.15,129.925) 70.15,128.625 73.3,125.475 73.3,121.525 73.925,120.9 ENET.2
NetENET_3: ENET.3 XP2.12 | length 12.3
  Top Layer w0.15: v1(70.175,127.775) 70.261,127.861 70.436,127.861 71.225,128.65 XP2.12
  Bottom Layer w0.15: v1(70.175,127.775) 71.406,126.544 71.631,126.544 72.775,125.4 72.775,120.8 73.925,119.65 ENET.3
NetENET_4: ENET.4 XP2.14 | length 13
  Top Layer w0.15: XP2.14 72.03,127.35 v1(75.05,127.35)
  Bottom Layer w0.15: ENET.4 74.625,118.4 75.6,119.375 75.6,123.25 75.05,123.8 v1(75.05,127.35)
NetENET_5: ENET.5 XP2.16 | length 13.5
  Top Layer w0.15: v1(70.2,126.3) 70.725,126.3 70.765,126.26 71.85,126.26 XP2.16
  Bottom Layer w0.15: v1(70.2,126.3) 71,125.5 71.987,125.5 72.075,125.412 72.075,119 73.925,117.15 ENET.5
NetENET_6: ENET.6 XP2.18 | length 13.6
  Top Layer w0.15: v1(70,124.875) 71.965,124.875 XP2.18
  Bottom Layer w0.15: v1(70,124.875) 71.137,124.875 71.225,124.787 71.225,118.6 73.925,115.9 ENET.6
NetGPIO_2: GPIO.2 XP3.8 | length 6.5
  Top Layer w0.15: GPIO.2 31.33,105.125 32.125,104.33 XP3.8
NetGPIO_3: GPIO.3 XP3.10 | length 6.7
  Top Layer w0.15: GPIO.3 31.525,103.875 31.7,103.7 31.7,103.213 31.703,103.21 32.75,103.21 XP3.10
NetGPIO_4: GPIO.4 XP3.12 | length 6.8
  Top Layer w0.15: GPIO.4 27.892,102.625 27.917,102.6 31.675,102.6 31.8,102.475 31.8,101.838 32.852,101.838 XP3.12
NetGPIO_5: GPIO.5 XP3.14 | length 6.5
  Top Layer w0.15: GPIO.5 27.872,101.375 28.224,101.022 31.623,101.022 32.125,100.52 XP3.14
NetI2C_2: I2C.2 XP3.11 | length 14.2
  Top Layer w0.15: XP3.11 30.885,101.79 v1(30.9,101.775)
  Bottom Layer w0.15: I2C.2 26.86,110.1 29.912,110.1 30,110.012 30,101.863 30.088,101.775 v1(30.9,101.775)
NetI2C_3: I2C.3 XP3.9 | length 14
  Top Layer w0.15: XP3.9 30.76,103.06 v1@30.825,103.125
  Bottom Layer w0.15: I2C.3 30.09,111.385 30.325,111.15 30.325,103.213 30.413,103.125 30.85,103.125 v1(30.9,103.175)
NetLED1_1: LED1.1 R36.1 | length 2.1
  Bottom Layer w0.15: R36.1 LED1.1
NetLED2_1: LED2.1 R35.1 | length 2.3
  Bottom Layer w0.15: R35.1 35.675,113.4 LED2.1
NetOUT_2: OUT.2 R7.2 | length 25.7
  Layer 1 w0.15: v1(38.875,118.675) 42.9,118.675 v1(45.925,115.65)
  Bottom Layer w0.15: OUT.2 33.35,121.05 34.1,120.3 34.1,119.5 34.325,119.275 38.275,119.275 v1(38.875,118.675) ; R7.2 44.783,118.05 45.925,116.908 v1(45.925,115.65)
NetR30_1: R30.1 TYPE-C.A5 | length 2.5
  Bottom Layer w0.15: R30.1 71.175,89.125 TYPE-C.A5
NetR34_1: R34.1 TYPE-C.B5 | length 2.7
  Bottom Layer w0.15: R34.1 71.125,86.7 71.7,86.125 TYPE-C.B5
NetR37_1: R37.1 R38.2 XT2.2 | length 26.2
  Top Layer w0.15: XT2.2 57.375,97.2 64.712,97.2 64.8,97.288 64.8,102 ; R37.1 59.436,102.264 59.7,102 64.8,102 ; R38.2 65.6,103.025 65.6,102.088 65.512,102 64.8,102
NetR38_1: R38.1 XP4.15 | length 7.5
  Top Layer w0.15: R38.1 66.475,104.825 66.875,104.425 66.875,99.7 67.325,99.25 XP4.15
NetR39_2: R39.2 S1.1 XP2.20 | length 22.5
  Top Layer w0.15: XP2.20 72.775,123.57 72.925,123.72 72.925,124.222 73.65,124.947 73.65,126.687 73.738,126.775 75.512,126.775 75.6,126.863 75.6,130.825 v1(74,132.425)
  Bottom Layer w0.15: R39.2 69.758,132.025 70.158,132.425 72.375,132.425 v1(74,132.425) S1.1@77.875,132.425
NetSIGNAL_1: SIGNAL.1 XP2.31 | length 35.4
  Layer 2 w0.15: SIGNAL.1 39.885,115.9 44.325,115.9 45.15,116.725 46.95,116.725 47.775,115.9 v1@68.1,115.9
  other v1: 68.129,115.924
NetSIGNAL_2: SIGNAL.2 XP2.29 | length 31.6
  Layer 2 w0.15: SIGNAL.2 40.95,117.375 67.803,117.375 67.978,117.2 v1(68.1,117.2)
NetSIGNAL_3: SIGNAL.3 XP2.27 | length 33.2
  Top Layer w0.15: XP2.27 68.135,118.525 v1(70.425,118.525)
  Layer 2 w0.15: SIGNAL.3 42.365,118.5 70.4,118.5 v1(70.425,118.525)
NetSIGNAL_4: SIGNAL.4 XP2.25 | length 25.8
  Layer 2 w0.15: SIGNAL.4 43.905,119.5 67.9,119.5 67.9,119.513 68.1,119.713 v1(68.1,119.835)
NetSIGNAL_5: SIGNAL.5 XP2.23 | length 23.2
  Layer 2 w0.15: SIGNAL.5 46.445,121.45 67.65,121.45 v1(68.1,121)
NetSIGNAL_6: SIGNAL.6 XP2.21 | length 24.4
  Top Layer w0.15: SIGNAL.6 49.285,121.75 64.374,121.75 64.815,121.309 64.815,120.071 65.386,119.5 66.194,119.5 66.765,120.071 66.765,121.238 67.175,121.648 67.175,122.15 67.325,122.3 XP2.21
NetSIGNAL_7: SIGNAL.7 XP2.19 | length 19.8
  Bottom Layer w0.15: SIGNAL.7 51.711,120.475 52.686,119.5 53.494,119.5 54.485,120.491 54.485,120.709 55.476,121.7 56.431,121.7 56.731,122 66.5,122 v1(68.1,123.6)
NetSIGNAL_8: SIGNAL.8 XP2.17 | length 16.9
  Bottom Layer w0.15: SIGNAL.8 54.615,122 56.034,122 57.001,122.967 57.001,123.185 58.216,124.4 67.7,124.4 v1@68.1,124.8
  other v1: 68.1,124.9
NetSIGNAL_9: SIGNAL.9 XP2.15 | length 19.1
  Bottom Layer w0.15: SIGNAL.9 56.855,121.7 68.85,121.7 68.938,121.788 68.938,125.962 68.762,126.138 68.638,126.138 68.6,126.1 v1(68,126.1)
NetSIGNAL_10: SIGNAL.10 XP2.13 | length 20.8
  Bottom Layer w0.15: SIGNAL.10 59.331,120.475 60.606,119.2 68.5,119.2 69.5,120.2 69.5,123.75 69.4,123.85 69.4,127.312 69.312,127.4 v1(68.1,127.4)
NetSIGNAL_11: SIGNAL.11 XP2.11 | length 23.8
  Top Layer w0.15: SIGNAL.11 61.685,121.45 64.25,121.45 64.5,121.2 64.5,119.588 64.888,119.2 66.42,119.2 66.53,119.31 69.193,119.31 69.4,119.517 69.4,124.212 69.245,124.367 67.03,124.367 66.8,124.597 66.8,128.512 66.888,128.6 68.05,128.6 XP2.11
NetSIGNAL_12: SIGNAL.12 XP2.9 | length 19.9
  Top Layer w0.15: SIGNAL.12 63.5,120.225 63.5,119.188 63.788,118.9 66.544,118.9 66.654,119.01 69.41,119.01 69.7,119.3 69.7,124.424 69.4,124.724 69.4,129.832 69.312,129.92 XP2.9
NetSIGNAL_13: SIGNAL.13 XP2.7 | length 15
  Top Layer w0.15: SIGNAL.13 65.962,120.647 65.962,121.362 66.765,122.165 66.765,123.935 66.475,124.225 64.903,124.225 64.815,124.313 64.815,129.162 66.853,131.2 68.09,131.2 XP2.7
NetSPI_5: SPI.5 XP1.33 | length 3
  Top Layer w0.15: SPI.5 27.125,116.05 27.762,115.412 27.762,115.143 28.225,114.68 XP1.33
NetSPI_6: SPI.6 XP3.6 | length 17.4
  Top Layer w0.15: SPI.6 27.125,114.8 27.775,114.15 27.775,113.092 28.217,112.65 34.212,112.65 34.3,112.562 34.3,105.688 34.212,105.6 XP3.6
NetUART3_2: UART3.2 XP3.23 | length 9.4
  Top Layer w0.15: XP3.23 29.775,94.17 29.925,94.32 29.925,94.822 30.825,95.722 v1(30.825,97.675)
  Bottom Layer w0.15: UART3.2 27.1,99.185 28.61,97.675 v1(30.825,97.675)
NetUART3_3: UART3.3 XP3.25 | length 13.2
  Top Layer w0.15: XP3.25 29.775,92.9 31.075,94.2 31.512,94.2 31.6,94.288 31.6,98.725 v1(31.05,99.275)
  Bottom Layer w0.15: UART3.3 27.1,100.435 28.26,99.275 v1(31.05,99.275)
NetUART4_2: UART4.2 XP2.28 | length 12.3
  Top Layer w0.15: XP2.28 72,118.113 72.088,118.025 73.087,118.025 73.65,117.462 73.65,115.5 75.225,113.925 75.225,109.35 74.6,108.725 UART4.2
NetUART4_3: UART4.3 XP2.30 | length 8.8
  Top Layer w0.15: XP2.30 72.775,117.22 73.25,116.745 73.25,110.625 73.9,109.975 UART4.3
NetUSART0_2: USART0.2 XP3.27 | length 9.9
  Top Layer w0.15: XP3.27 29.02,91.65 v1(31.025,91.65)
  Bottom Layer w0.15: USART0.2 29.885,88.085 31.875,90.075 31.875,90.8 v1(31.025,91.65)
NetUSART0_3: USART0.3 XP3.29 | length 6.6
  Top Layer w0.15: XP3.29 29.04,90.4 v1(30.95,90.4)
  Bottom Layer w0.15: USART0.3 27.125,89.335 28.215,90.425 30.925,90.425 v1(30.95,90.4)
NetUSART1_2: USART1.2 XP1.17 | length 7.8
  Top Layer w0.15: USART1.2 27.125,130.725 27.75,130.1 27.75,124.813 28.973,124.813 XP1.17
NetUSART1_3: USART1.3 XP1.19 | length 9.5
  Top Layer w0.15: USART1.3 26.425,129.475 25.8,128.85 25.8,123.925 26.155,123.57 XP1.19
NetUSART2_2: USART2.2 XP4.10 | length 3.1
  Top Layer w0.15: v1(71.875,103.05) 71.885,103.06 XP4.10
  Bottom Layer w0.15: v1(71.875,103.05) 73.363,101.562 74.188,101.562 USART2.2
NetUSART2_3: USART2.3 XP4.12 | length 3
  Top Layer w0.15: v1(71.95,101.8) 71.99,101.8 XP4.12
  Bottom Layer w0.15: v1(71.95,101.8) 73.175,100.575 73.925,100.575 USART2.3
NetUSART2_4: USART2.4 XP4.14 | length 3.1
  Top Layer w0.15: v1(71.925,100.575) 71.945,100.575 XP4.14
  Bottom Layer w0.15: v1(71.925,100.575) 73.175,99.325 73.925,99.325 USART2.4
NetUSART2_5: USART2.5 XP4.16 | length 2.9
  Top Layer w0.15: v1(72,99.225) XP4.16
  Bottom Layer w0.15: v1(72,99.225) 73.15,98.075 73.925,98.075 USART2.5
NetUSART5_2: USART5.2 XP4.22 | length 3.9
  Top Layer w0.15: XP4.22 72.775,95.44 73.25,95.915 73.25,97.1 73.9,97.75 USART5.2
NetUSART5_3: USART5.3 XP4.24 | length 8.7
  Top Layer w0.15: XP4.24 71.995,94.175 70.863,94.175 70.775,94.263 70.775,97.028 71.092,97.345 72.908,97.345 73.225,97.662 73.225,98.325 73.9,99 USART5.3
SERVO: C18.1 L2.2 R17.2 R18.2 VCC.1 VCC.2 VCC.3 VCC.4 VCC.5 VCC.6 VCC.7 VCC.8 VCC.9 VCC.10 VCC.11 VCC.12 VCC.13
  other v1: 65.825,101.15 66.775,117.9
VCC: C2.1 C10.2 C14.2 C17.2 C21.2 C24.2 C28.2 C29.2 C31.1 DC1.7 DC2.7 DC3.7 LDO.1 OUT.1 R4.2 R14.2 R22.2 R31.2 VD1.2 XP1.1 XP1.2 XP1.3 XP1.4 XP1.5 XP1.6 XP4.35 XP4.36 XP4.37 XP4.38 XP4.39 XP4.40 XT1.1 XT2.1 | length 5.6
  Layer 2 w0.6: v1(24.7,121.675) 27.05,121.675 27.175,121.8
  Bottom Layer w0.6: v1(24.7,121.675) 24.7,121.389 25.889,120.2 26.075,120.2 26.475,119.8 OUT.1
  other v1: 70.15,85.05 52.525,87.5 37.575,92.4 45.6,94.925 47.225,108.585 61.45,109.085 36.75,112.475 58.575,113.475 70.55,113.575 57.3,115.3 47.6,133.275 30.925,133.6
pads on no net: ADC.S AT.1 AT.2 AT.7 AT.13 AT.14 AT.15 AT.16 AT.27 AT.28 CAN1.S ENET.S GPIO.S I2C.S IN.S OUT.S SPI.S TYPE-C. TYPE-C.A6 TYPE-C.A7 TYPE-C.A8 TYPE-C.B6 TYPE-C.B7 TYPE-C.B8 TYPE-C.S1 TYPE-C.S2 TYPE-C.S3 TYPE-C.S4 UART3.S UART4.S USART0.S USART1.S USART2.S USART5.S XP1.15 XP1.16 XP1.18 XP1.20 XP1.21 XP1.22 XP1.23 XP1.24 XP1.26 XP1.28 XP1.30 XP1.32 XP1.34 XP1.35 XP1.36 XP2.22 XP2.32 XP2.33 XP2.34 XP2.35 XP2.36 XP3.5 XP3.7 XP3.13 XP3.15 XP3.16 XP3.17 XP3.18 XP3.19 XP3.20 XP3.21 XP3.22 XP3.31 XP3.33 XP3.34 XP4.5 XP4.6 XP4.7 XP4.8 XP4.9 XP4.11 XP4.13 XP4.18 XP4.19 XP4.20 XP4.21 XP4.23 XP4.25 XP4.26 XT1.S1 XT1.S2 XT2.S1 XT2.S2

## Polygon pours and split planes (outlines as drawn)
5V on Top Layer "NONET_L-01_P-001" (solid, remove dead copper, pour order 79): 39.65,115.2 49.775,115.2 49.8,115.175 49.8,119.225 34.6,119.225 34.575,119.25 34.55,119.225 34.55,116.25 39.625,116.25 39.65,116.225
GND on Top Layer "NONET_L-01_P-001" (solid, remove dead copper, pour order 120): 22.25,135.5 22.25,82.9 79.325,82.9 79.325,135.5
5V on Top Layer "NONET_L-01_P-001" (solid, remove dead copper, pour order 119): 73.325,118.95 73.369,118.906 73.369,117.744 79.194,117.744 79.275,117.825 79.275,119.475 75.525,119.475 75.475,119.425 75.475,118.95
5V on Top Layer "NONET_L-01_P-001" (solid, remove dead copper, pour order 117): 66.6,88.35 66.6,87.325 73.75,87.325 73.775,87.35 73.775,88.35
3V3 on Top Layer "NONET_L-01_P-001" (solid, remove dead copper, pour order 115): 66.9,89.6 66.9,88.6 73.475,88.6 73.6,88.725 73.575,88.75 73.575,89.6
3V3 on Top Layer "NONET_L-01_P-001" (solid, remove dead copper, pour order 112): 73.325,108 75.475,108 75.475,106.125 73.325,106.125
3V3 on Top Layer "NONET_L-01_P-001" (solid, remove dead copper, pour order 110): 73.575,96.925 73.575,94.75 75.3,94.75 75.3,96.85 75.225,96.925
VCC on Top Layer "NONET_L-01_P-001" (solid, remove dead copper, pour order 108): 28.05,135.251 28.05,132.025 34.725,132.025 34.7,135.25 34.7,135.3
VCC on Top Layer "NONET_L-01_P-001" (solid, remove dead copper, pour order 104): 66.35,87.075 66.35,83.175 74.15,83.175 74.15,87.075
VCC on Top Layer "NONET_L-01_P-001" (solid, remove dead copper, pour order 100): 44.15,135.125 44.125,135.1 44.125,131.35 52.25,131.35 52.2,131.4 52.2,135.05
3V3 on Top Layer "NONET_L-01_P-001" (solid, remove dead copper, pour order 99): 44.1,130.475 44.1,126.975 44.125,126.95 52.15,126.95 52.15,130.475 52.175,130.5
4V2 on Top Layer "NONET_L-01_P-001" (solid, remove dead copper, pour order 96): 27.925,129.175 27.925,126.825 34.225,126.825 34.225,129.175
3V3 on Top Layer "NONET_L-01_P-001" (solid, remove dead copper, pour order 93): 28.025,130.325 28,130.3 28,129.4 34.15,129.4 34.175,129.425 34.175,130.375
5V on Top Layer "NONET_L-01_P-001" (solid, remove dead copper, pour order 92): 28.05,131.75 28.05,130.525 33.925,130.525 33.925,131.75
5V on Top Layer "NONET_L-01_P-001" (solid, remove dead copper, pour order 88): 25.625,123.075 25.625,120.6 31.225,120.6 31.225,123.075
3V3 on Top Layer "NONET_L-01_P-001" (solid, remove dead copper, pour order 84): 25.6,94.65 27.75,94.65 27.75,92.425 25.6,92.425
3V3 on Top Layer "NONET_L-01_P-001" (solid, remove dead copper, pour order 83): 25.6,107.725 25.625,107.7 25.625,105.825 27.775,105.825 27.75,105.85 27.75,107.7
3V3 on Top Layer "NONET_L-01_P-001" (solid, remove dead copper, pour order 82): 25.6,133.225 25.6,131.425 25.625,131.4 27.8,131.4 27.8,133.225
VCC on Top Layer "NONET_L-01_P-001" (solid, remove dead copper, pour order 78): 34.875,114.125 39,114.125 39,110.75 38.9,110.85 34.875,110.85
NetC9_2 on Top Layer "NONET_L-01_P-001" (solid, remove dead copper, pour order 77): 41.25,109.45 43.5,109.45 43.5,110.25 49.025,110.25 49.05,110.275 49.05,109.375 50.4,109.375 50.45,109.425 50.45,111.7 53.125,111.7 53.175,111.75 53.175,114.575 41.3,114.575 41.225,114.65
VCC on Top Layer "NONET_L-01_P-001" (solid, remove dead copper, pour order 76): 46.1,109.175 46.125,109.15 46.125,107.75 47.335,107.75 48.675,106.41 48.675,105.1 48.775,105 50.4,105 50.4,107.425 48.65,109.175 46.125,109.175
5V on Top Layer "NONET_L-01_P-001" (solid, remove dead copper, pour order 75): 39.175,103.175 39.175,101.1 41.225,99.05 43.325,99.05 43.325,102.4 42.55,103.175
VCC on Top Layer "NONET_L-01_P-001" (solid, remove dead copper, pour order 56): 57.7,97.5 57.8,97.4 64.6,97.4 64.6,101.7 58.8,101.7 57.9,102.7 57.9,103 57.9,109.6 60.8,109.6 60.8,104 63,104 63,106.5 64,106.5 63.9,106.6 63.9,114.5 62.5,114.5 62.5,119 56.6,119 56.6,98.6 57.8,97.4
4V2 on Top Layer "NONET_L-01_P-001" (solid, remove dead copper, pour order 50): 46.35,96.775 46.35,95.125 53.65,95.125 53.65,92.75 53.675,92.725 61.45,92.725 61.45,96.8 46.575,96.8 46.35,96.8
4V2 on Top Layer "NONET_L-01_P-001" (solid, remove dead copper, pour order 52): 61.1,95.45 66.85,95.45 66.85,92.225 73.075,92.225 73.15,92.15 73.15,90.05 65.25,90.05 64.475,90.825 64.475,92.75 61.475,92.75 61.45,92.725
4V2 on Top Layer "NONET_L-01_P-001" (solid, remove dead copper, pour order 51): 48.7,84.85 48.675,84.825 48.675,82.9 55.55,82.9 55.925,83.275 55.95,83.25 55.95,85.75 55.15,86.55 55.025,86.425 51.6,86.425 51.6,85.475 51.125,85 48.675,85
VCC on Top Layer "NONET_L-01_P-001" (solid, remove dead copper, pour order 49): 44.525,95.125 44.475,95.075 44.475,93.125 46.45,93.125 46.45,95.55 44.5,95.55
VCC on Top Layer "NONET_L-01_P-001" (solid, remove dead copper, pour order 48): 47.25,89.875 47.25,88.375 49.425,88.375 49.7,88.1 49.7,86.65 57.925,86.65 57.9,86.625 57.9,85.25 60.25,85.25 60.25,87.975 51.15,87.975 49.25,89.875
VCC on Top Layer "NONET_L-01_P-001" (solid, remove dead copper, pour order 47): 36.7,93.3 36.725,93.275 36.725,91.65 40.025,91.65 40,91.675 40,93.325
NetC23_2 on Top Layer "NONET_L-01_P-001" (solid, remove dead copper, pour order 46): 40.225,96.45 40.225,93.925 42.125,93.925 42.125,90.025 42.3,89.85 44.55,89.85 44.55,91.1 44.6,91.15 50.325,91.15 53.275,88.2 64.425,88.2 64.425,90.8 63.944,92.05 48.175,92.05 48.075,92.15 48.075,92.925 44.4,92.925 44.401,92.926 44.401,96.429
GND on Layer 1 "NONET_L-01_P-001" (solid, remove dead copper, pour order 122): 22.25,135.5 22.25,82.9 79.025,82.9 79.325,83.2 79.325,135.5
5V on Layer 1 "NONET_L-01_P-001" (solid, remove dead copper, pour order 118): 62.175,88.025 62.175,82.975 62.2,82.95 79.25,82.95 79.25,120.05 79.175,120.125 79.075,120.025 75.675,120.025 75.675,88.3 75.6,88.225
5V on Layer 1 "NONET_L-01_P-001" (solid, remove dead copper, pour order 116): 47.3,103.5 62,103.5 62.45,103.05 62.45,99.325 65.925,99.325 66.625,98.625 66.625,88.375 79.2,88.375 79.25,88.325 79.25,86.5 74.575,86.5 74.55,86.525 74.55,87.2 74.45,87.3 62.075,87.3 62.075,95.55 61.675,95.95 40.425,95.95 40.425,103.625 40.15,103.9
3V3 on Layer 1 "NONET_L-01_P-001" (solid, remove dead copper, pour order 114): 73.325,95.691 73.325,89.7 73.35,89.675 73.3,89.625 66.875,89.625 66.875,88.6 66.925,88.65 76.3,88.65 76.3,93.8 74.372,95.728
3V3 on Layer 1 "NONET_L-01_P-001" (solid, remove dead copper, pour order 109): 52.15,130.5 52.275,130.625 78.8,130.625 78.8,127.775 77.95,126.925 75.475,126.925 75.475,94.625 75.4,94.55 73.325,94.55 73.325,126.875 73.25,126.95 52.15,126.95
5V on Layer 1 "NONET_L-01_P-001" (solid, remove dead copper, pour order 98): 42.575,105.15 47.75,105.15 47.75,102.625 42.525,102.625
4V2 on Layer 1 "NONET_L-01_P-001" (solid, remove dead copper, pour order 95): 47.575,85.125 49.875,85.125 49.8,85.05 49.8,82.9 22.25,82.9 22.25,135.5 25.475,135.5 25.45,135.475 25.45,84.85 25.525,84.925 47.575,84.925
4V2 on Layer 1 "NONET_L-01_P-001" (solid, remove dead copper, pour order 94): 57.375,95.55 57.375,85.575 56.925,85.125 47.575,85.125 47.575,82.9 61.325,82.9 61.7,83.275 61.7,95.6
5V on Layer 1 "NONET_L-01_P-001" (solid, remove dead copper, pour order 87): 42.4,118.85 32.675,118.85 32.55,118.975 32.55,126.5 32.55,128 28.175,128 28.175,100.8 28.15,100.775 42.4,100.775
3V3 on Layer 1 "NONET_L-01_P-001" (solid, remove dead copper, pour order 81): 33.95,130.5 52.15,130.5 52.15,126.95 36.675,126.95 34.375,129.25 27.75,129.25 27.75,85.25 25.6,85.25 25.6,133.25 27.75,133.25 27.8,133.2 27.8,130.5
5V on Layer 1 "NONET_L-01_P-001" (solid, remove dead copper, pour order 80): 37.375,118.85 37.4,118.825 43.575,118.825 43.575,99.05 43.55,99.025 37.25,99.025
SERVO on Layer 1 "NONET_L-01_P-001" (solid, remove dead copper, pour order 74): 64.775,100.8 69,100.8 69.3,101.1 69.3,123.95 33.75,123.95 33.65,123.85 33.65,121.925 56.725,121.925 56.8,122 56.8,117.05 60.2,117.05 60.25,117.1 62.6,114.75 62.6,101.4 62.725,101.275
GND on Bottom Layer "NONET_L-01_P-001" (solid, remove dead copper, pour order 121): 22.25,135.5 22.25,82.9 79.325,82.9 79.325,135.5
5V on Bottom Layer "NONET_L-01_P-001" (solid, remove dead copper, pour order 59): 48.825,117.5 51.5,117.5 51.5,112.5 48.6,112.5 48.6,112.9 50.2,112.9 50.2,114.5 48.825,114.5
3V3 on Bottom Layer "NONET_L-01_P-001" (solid, remove dead copper, pour order 113): 71.625,129.85 71.65,129.825 71.65,128.225 78.775,128.225 78.8,128.2 78.8,129.875
3V3 on Bottom Layer "NONET_L-01_P-001" (solid, remove dead copper, pour order 111): 73.325,104.2 73.325,102.275 75.475,102.275 75.475,104.175
5V on Bottom Layer "NONET_L-01_P-001" (solid, remove dead copper, pour order 91): 27.825,131.913 27.825,129.675 30.525,126.975 34.15,126.975 34.15,131.888
5V on Bottom Layer "NONET_L-01_P-001" (solid, remove dead copper, pour order 90): 26.1,129.9 26.1,126.975 31.875,126.975 32.15,127.25 32.15,129.875
5V on Bottom Layer "NONET_L-01_P-001" (solid, remove dead copper, pour order 89): 25.6,109.475 29.625,109.475 29.625,108 29.6,107.975 25.6,107.975
3V3 on Bottom Layer "NONET_L-01_P-001" (solid, remove dead copper, pour order 86): 25.6,98.5 25.6,96.525 25.625,96.5 27.75,96.5 27.75,98.25 27.5,98.5 27.5,98.525
3V3 on Bottom Layer "NONET_L-01_P-001" (solid, remove dead copper, pour order 85): 25.6,87.375 25.6,85.25 27.75,85.25 27.75,87.375
SERVO on Bottom Layer "NONET_L-01_P-001" (solid, remove dead copper, pour order 73): 57.725,118.85 57.75,118.825 57.75,116.25 67.6,116.25 67.625,116.275 67.6,116.3 67.6,117.525 69.875,117.525 69.875,118.899
VCC on Bottom Layer "NONET_L-01_P-001" (solid, remove dead copper, pour order 72): 70.15,115.35 70.175,115.325 70.175,111.775 73.5,111.775 73.5,115.325
SERVO on Bottom Layer "NONET_L-01_P-001" (solid, remove dead copper, pour order 71): 63.425,103.5 63.45,103.475 65.35,103.475 65.35,101.975 65.45,101.875 69.725,101.875 69.725,104.225 71.35,104.225 71.35,100.925 71.125,100.7 64.7,100.7 63.425,101.975
VCC on Bottom Layer "NONET_L-01_P-001" (solid, remove dead copper, pour order 55): 44,101.8 64.225,101.8 64.225,96.725 44,96.725
VCC on Bottom Layer "NONET_L-01_P-001" (solid, remove dead copper, pour order 70): 60.2,109.7 62.6,109.7 62.6,108.2 60.1,108.2 60.1,107.2 59.3,106.4 58.25,106.4 58.25,108.45 58.3,108.5 59.8,108.5 59.8,109.3 60,109.5
NetC16_2 on Bottom Layer "NONET_L-01_P-001" (solid, remove dead copper, pour order 69): 54,116 54,112 58.3,112 58.3,110.3 65.2,110.3 65.5,110 67.5,110 67.5,116
5V on Bottom Layer "NONET_L-01_P-001" (solid, remove dead copper, pour order 68): 72.5,90.6 72.5,89.9 74.3,89.9 74.3,85.9 72.5,85.9 72.5,85.1 76.1,85.1 76.1,90.6
GND on Bottom Layer "NONET_L-01_P-001" (solid, remove dead copper, pour order 67): 31.7,109.8 36.3,109.8 36.3,103.5 32.5,103.5 31.6,104.4
GND on Bottom Layer "NONET_L-01_P-001" (solid, remove dead copper, pour order 66): 38.5,109.7 38.5,107.2 38.55,107.15 40.15,107.15 40.15,108.35 40.5,108.7 41,108.7 41,109.7
5V on Bottom Layer "NONET_L-01_P-001" (solid, remove dead copper, pour order 65): 44.8,105 44.8,103.4 48.892,103.4 48.892,104.752 48.643,105 48.1,105
5V on Bottom Layer "NONET_L-01_P-001" (solid, remove dead copper, pour order 63): 44.6,109.7 44.6,109.1 42.6,109.1 42.5,109 42.5,107.7 42.1,107.3 42.1,107 41.7,106.6 40.5,106.6 40.5,103.4 36.5,103.4 36.5,109.8 38.2,109.8 38.2,106.6 39.7,106.6 39.7,107.1 39.8,107.2 41.7,107.2 41.7,109.7
5V on Bottom Layer "NONET_L-01_P-001" (solid, remove dead copper, pour order 62): 41.7,113 43,111.7 44.6,111.7 44.6,111.1 38.9,111.1 38.8,111 38.8,110.4 33.4,110.4 32.7,111.1 32.7,112.3 33.8,112.3 33.8,110.9 37.7,110.9 38.3,111.5 40.4,111.5 40.4,112.9 40.3,113
GND on Bottom Layer "NONET_L-01_P-001" (solid, remove dead copper, pour order 60): 51.7,117.5 53.5,117.5 53.5,111.8 48.6,111.8 48.6,112.2 51.7,112.2
VCC on Bottom Layer "NONET_L-01_P-001" (solid, remove dead copper, pour order 58): 49.025,97.373 49.025,90.4 64.3,90.4 64.3,99.948
GND on Layer 2 "NONET_L-01_P-001" (solid, remove dead copper, pour order 123): 22.25,135.5 22.25,82.9 79.325,82.9 79.325,135.5
VCC on Layer 2 "NONET_L-01_P-001" (solid, remove dead copper, pour order 103): 59.65,115.95 59.65,135.125 31.6,135.225 31.5,135.125 31.5,127.35 25.55,127.35 25.5,127.4 25.5,102.85 35.975,102.85 36.025,102.9 37.35,101.575 48.2,101.575 48.2,97.225 47.875,96.9 44,96.9 44,83.2 44.125,83.075 44.225,83.175 75.4,83.175 75.4,91.375 75.275,91.5 60.2,91.5
VCC on Layer 2 "NONET_L-01_P-001" (solid, remove dead copper, pour order 107): 27.75,135.275 27.775,135.25 27.775,132.025 31.625,132.025 31.7,131.95 31.925,132.175 31.925,135.25
VCC on Layer 2 "NONET_L-01_P-001" (solid, remove dead copper, pour order 106): 59.659,115.569 71.331,115.569 71.375,115.525 71.375,111.725 58.25,111.725
VCC on Layer 2 "NONET_L-01_P-001" (solid, remove dead copper, pour order 105): 36.7,94.401 36.7,90.35 46.075,90.35 46.475,89.95 46.475,94.425
4V2 on Layer 2 "NONET_L-01_P-001" (solid, remove dead copper, pour order 97): 22.25,128.25 22.275,128.225 22.275,127.725 34.375,127.725 34.4,127.75 34.375,127.775 34.375,129.75 22.275,129.75

## Silkscreen, mask and mechanical layers (free items; w line width, h text height)
Mechanical 1:
  the board outline again, w0.254